# EAGLE board Tommy (EAGLE 6.3), part 1 of 3
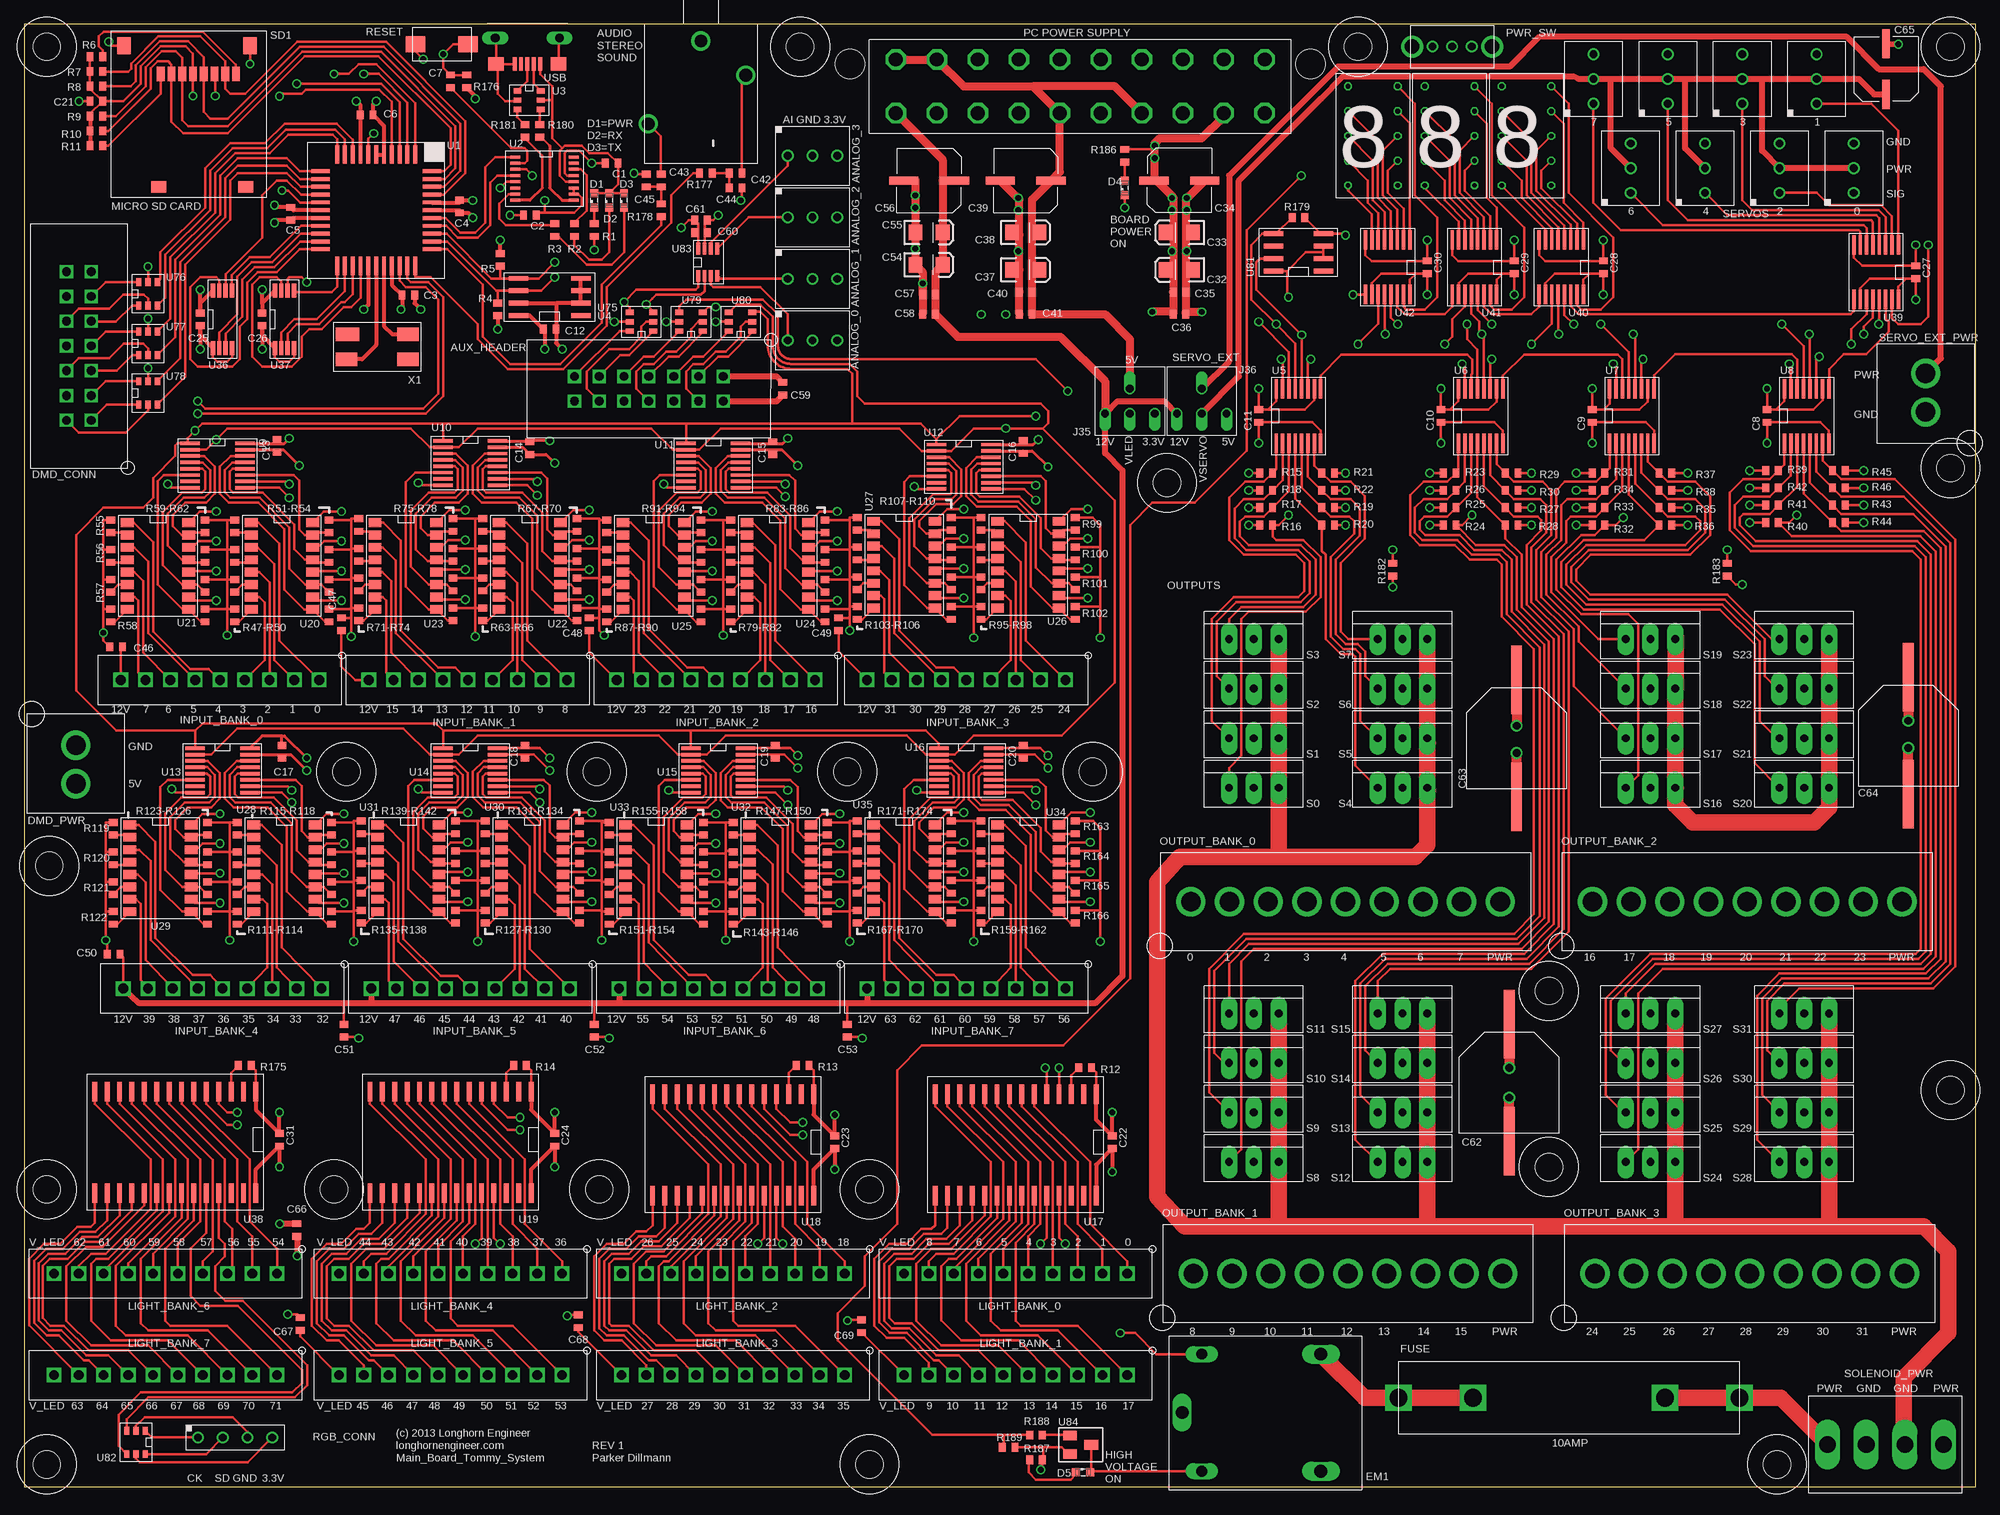
[diagram p0: board, top side]
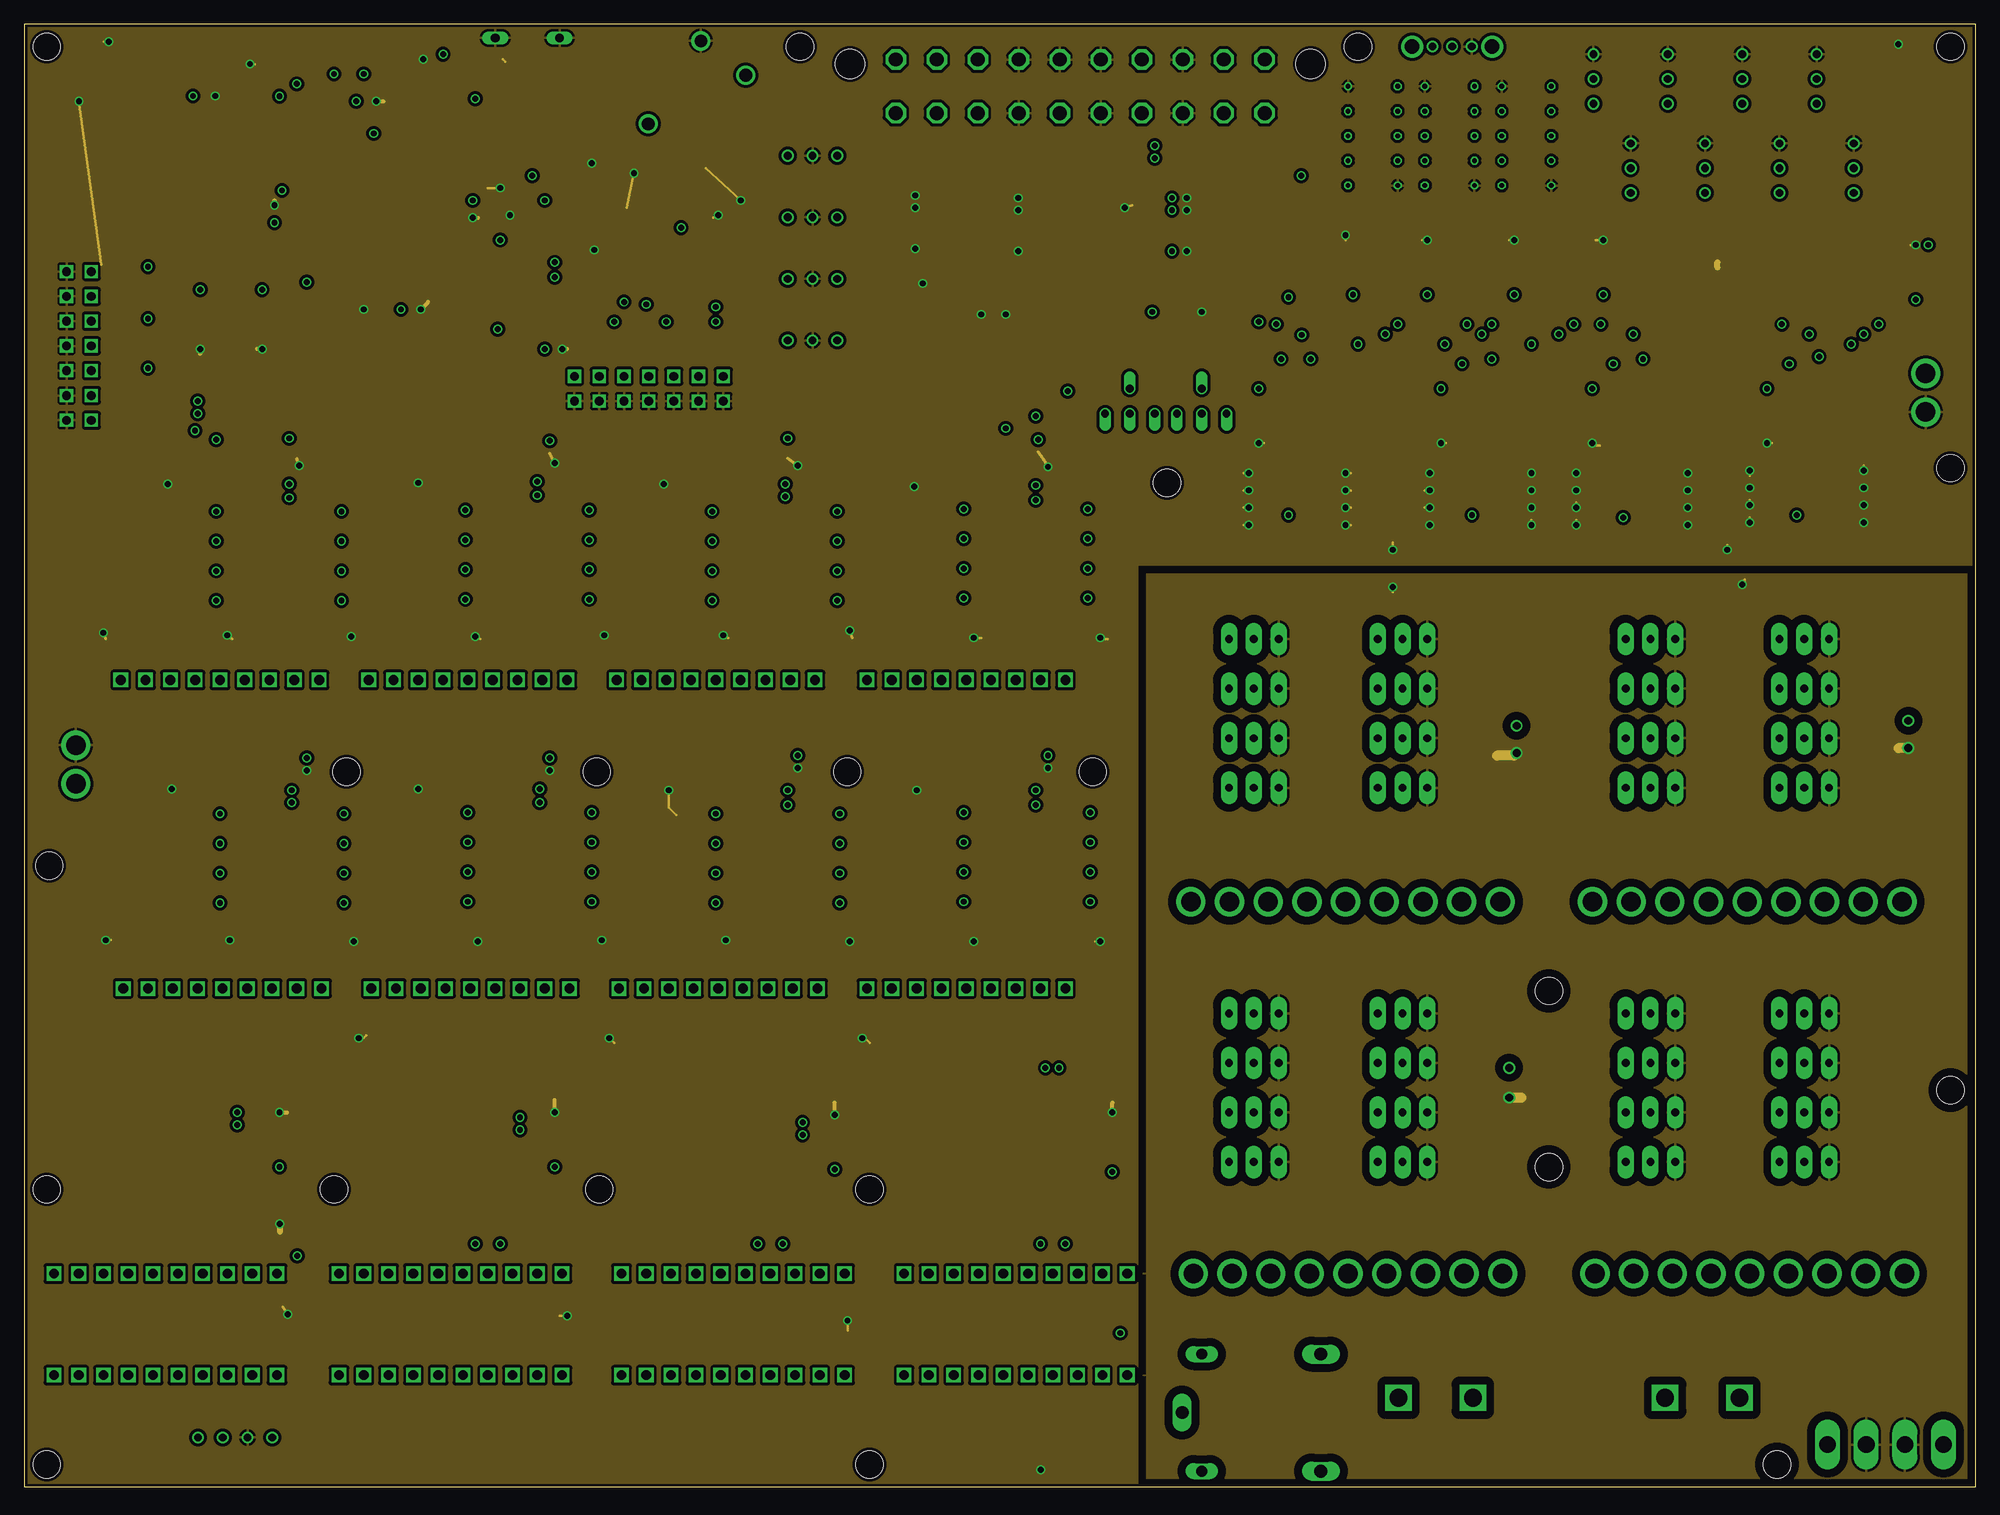
[diagram p1: board, inner layer GND]
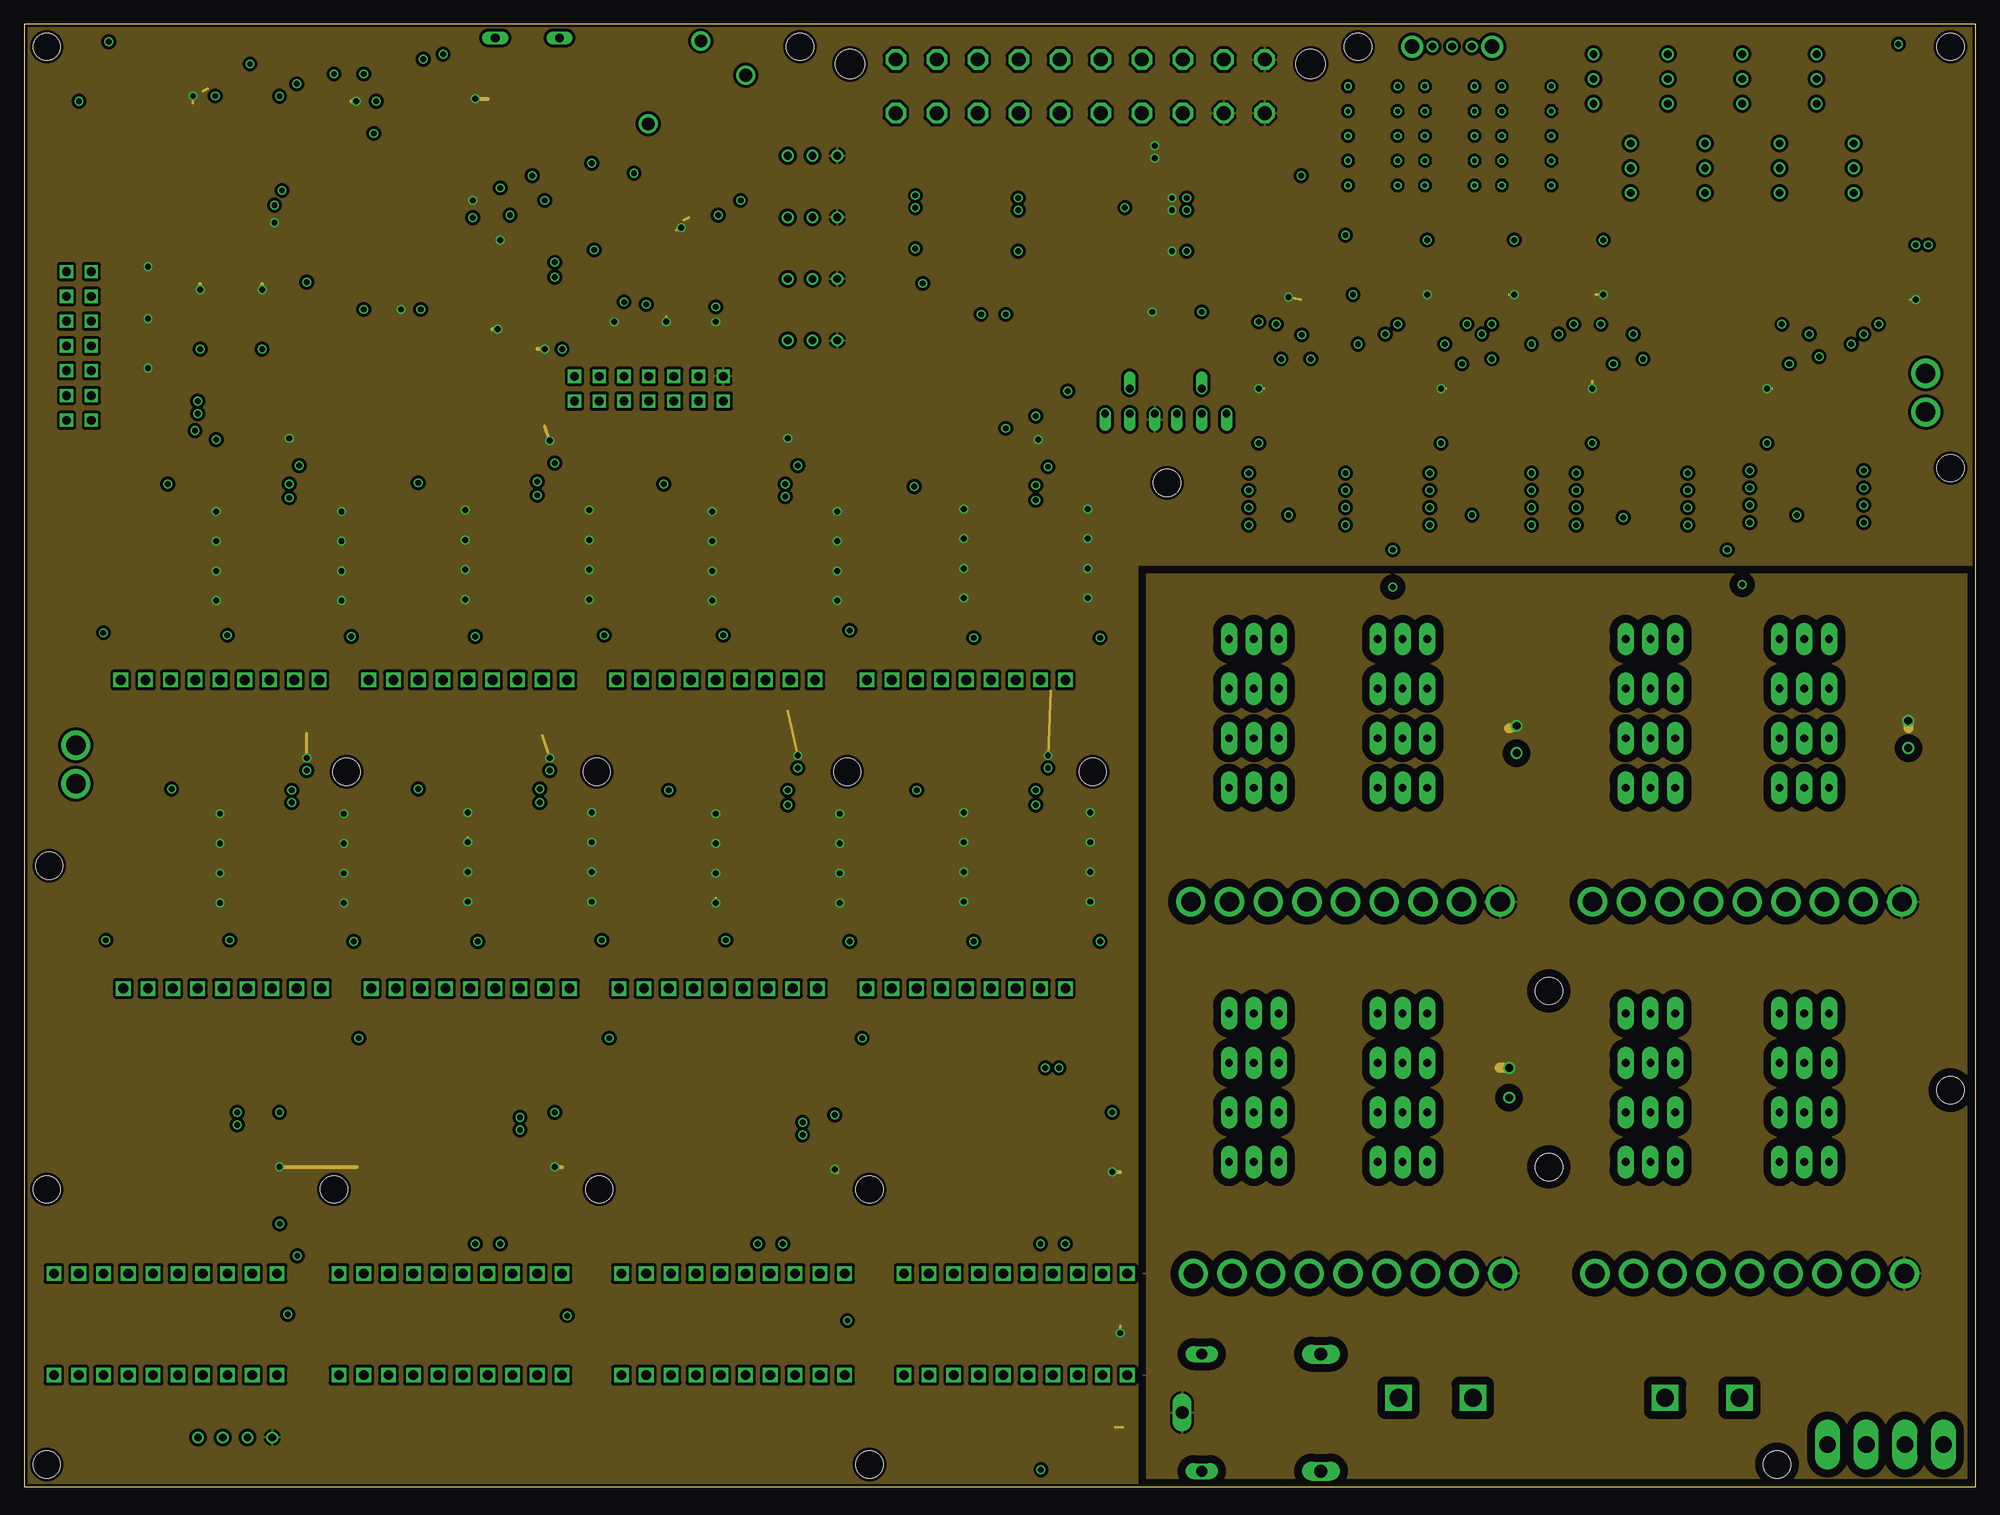
[diagram p2: board, inner layer POWER]
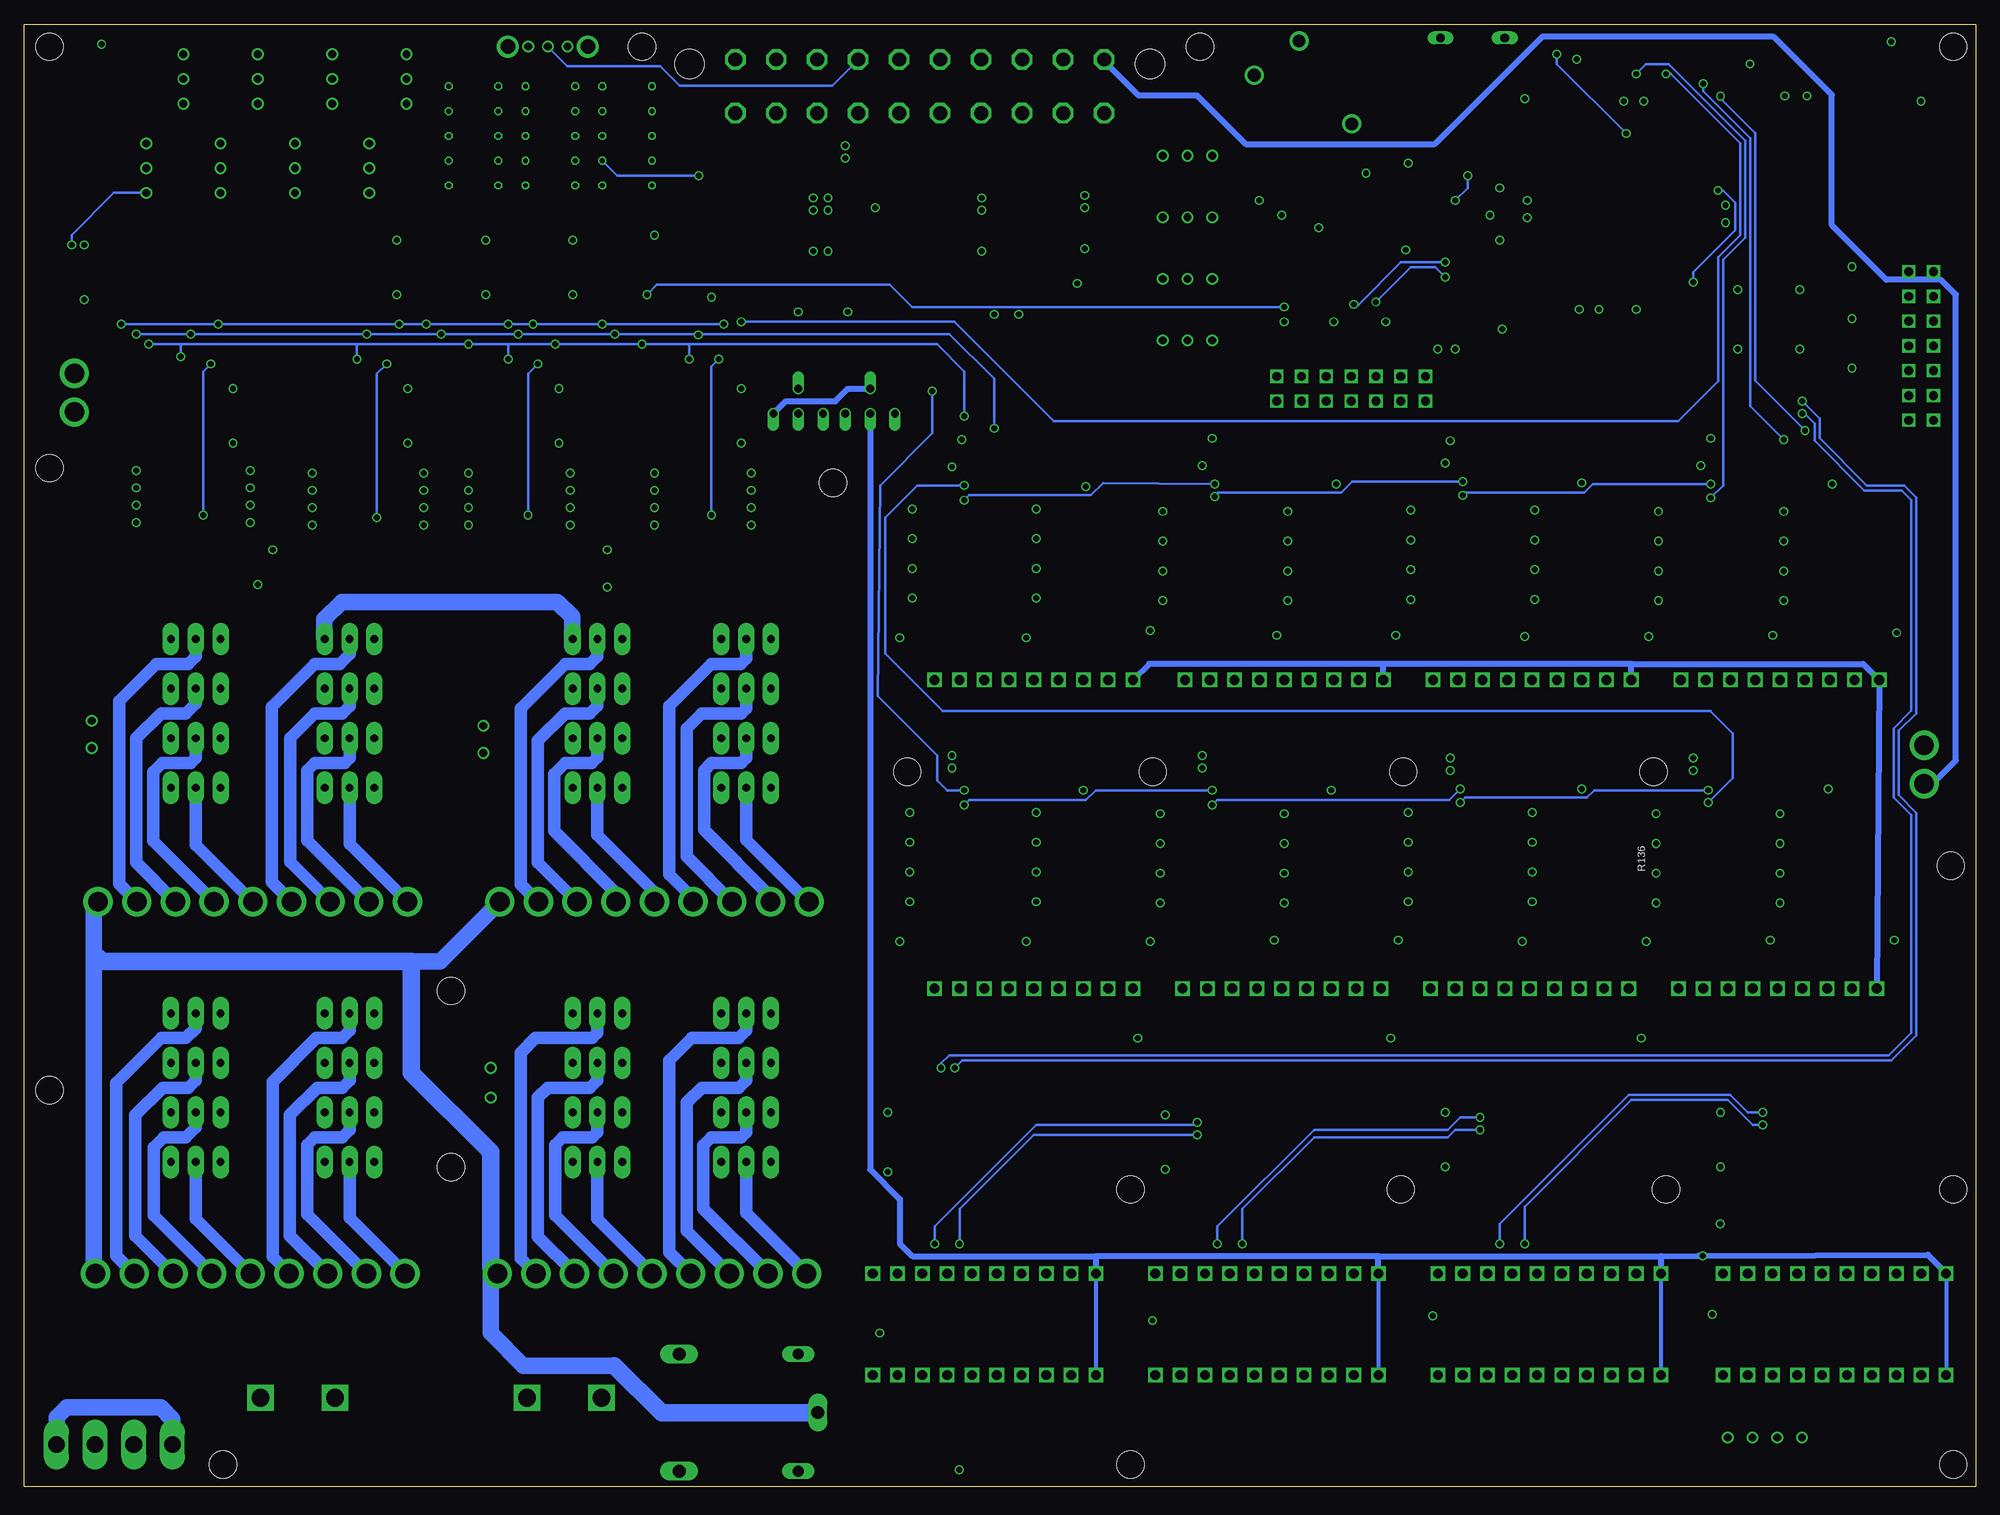
[diagram p3: board, bottom side, seen from below]

Size 199.9 x 149.86 mm. Coordinates in mm from the lower left corner, seen from the top.
Outline: 0,0 199.9,0 199.9,149.86 0,149.86 0,0
Copper layers (1*2*15*16): Top 0.035mm / dielectric 0.2mm / GND 0.0175mm / dielectric 1.1mm / POWER 0.0175mm / dielectric 0.2mm / Bottom 0.035mm
Design rules "SeeedStudio_4_Layer_DRU": minimum track width 6mil, minimum drill 12mil, track to track 6mil, track to pad 6mil, pad to pad 6mil, via to via 6mil, smd to smd 0mil, copper to edge 10mil, drill to drill 10mil, minimum pad ring 6mil, minimum via ring 6mil, stop-mask expansion 2mil, vias tented up to drill 25mil, thermal gap 10mil

## Footprints (pad centres in the part's own frame; a part is rotated, then mirrored left to right if it is on the bottom)
HEADER_01X03_PTH = drill 0.8: 1 0,0; 2 2.54,0; 3 5.08,0
161-3507-E = drill 1.3: 1 1.7,0; 2 10.2,-5.4; 5 5.2,4.6
HEADER_02X07_PTH = drill 0.9 square: 1 -7.62,-1.27; 2 -5.08,-1.27; 3 -2.54,-1.27; 4 0,-1.27; 5 2.54,-1.27; 6 5.08,-1.27; 7 7.62,-1.27; 8 7.62,1.27; 9 5.08,1.27; 10 2.54,1.27; 11 0,1.27; 12 -2.54,1.27; 13 -5.08,1.27; 14 -7.62,1.27
0402 = smd 0.7 x 0.9: 1 -0.65,0; 2 0.65,0
1206_POLARIZED = smd 1.4 x 1.6: + 1.4,0; - -1.4,0
6.3MM_CAP_SMD = smd 0.8 x 3: NEG 0,-2.6; POS 0,2.6
EEH-ZA1V271P = smd 7 x 1.1: N -6,0; P 6,0
SML0603 = smd 0.8 x 0.8: A 0.75,0; C -0.75,0
MOLEX_KK_2 = drill 2: P$1 -1.88,0; P$2 2.083,0
G5LA_PCBRELAY_SPDT = drill 1.3 long: 1 0,0; 3 14.2,6; 4 14.2,-6 | drill 1.1 long: 2 2,6; 5 2,-6
4245K = drill 1.8 square: 1A -17.465,0; 1B -9.845,0; 2A 17.465,0; 2B 9.845,0
HEADER_01X09_PTH = drill 1 square: 1 -10.16,0; 2 -7.62,0; 3 -5.08,0; 4 -2.54,0; 5 0,0; 6 2.54,0; 7 5.08,0; 8 7.62,0; 9 10.16,0
ROYS_VOLTAGE_CHOOSER = drill 0.8 offset: 1 0,2.54; 2 -2.54,0; 3 0,-2.54; OUT 0,0
HEADER_01X10_PTH = drill 1 square: 1 -11.43,0; 2 -8.89,0; 3 -6.35,0; 4 -3.81,0; 5 -1.27,0; 6 1.27,0; 7 3.81,0; 8 6.35,0; 9 8.89,0; 10 11.43,0
MOLEX_KK_9 = drill 2: P$1 -15.85,0; P$2 -11.887,0; P$3 -7.925,0; P$4 -3.962,0; P$5 0,0; P$6 3.962,0; P$7 7.925,0; P$8 11.887,0; P$9 15.85,0
MOLEX_39-29-9202 = drill 1.4 octagon: 1 18.9,-2.75; 2 18.9,2.75; 3 14.7,-2.75; 4 14.7,2.75; 5 10.5,-2.75; 6 10.5,2.75; 7 6.3,-2.75; 8 6.3,2.75; 9 2.1,-2.75; 10 2.1,2.75; 11 -2.1,-2.75; 12 -2.1,2.75; 13 -6.3,-2.75; 14 -6.3,2.75; 15 -10.5,-2.75; 16 -10.5,2.75; 17 -14.7,-2.75; 18 -14.7,2.75; 19 -18.9,-2.75; 20 -18.9,2.75 | hole 3: -23.6,2.29; 23.6,2.29
101-0134-EV = smd 2 x 1.6: 1 -2.7,0; 2 2.7,0
HEADER_01X04_PTH_ROUND = drill 0.8: 1 -3.81,0; 2 -1.27,0; 3 1.27,0; 4 3.81,0
TO-220AB = drill 0.8 pad 1.676 long: D 0,0; G 2.54,0; S -2.54,0
502570-0893 = smd 0.8 x 1.5: 1 7.7,0; 2 6.6,0; 3 5.5,0; 4 4.4,0; 5 3.3,0; 6 2.2,0; 7 1.1,0; 8 0,0 | smd 1.4 x 1.73: SHIELD0 -3.75,2.9; SHIELD1 9.15,2.9 | smd 1.5 x 1.15: SHIELD2 8.7,-11.575; SHIELD3 -0.2,-11.575
LSHD-A103 = drill 0.5 octagon: 1 -2.54,5.08; 2 -2.54,2.54; 3 -2.54,0; 4 -2.54,-2.54; 5 -2.54,-5.08; 6 2.54,-5.08; 7 2.54,-2.54; 8 2.54,0; 9 2.54,2.54; 10 2.54,5.08
MOLEX_KK_4 = drill 1.702 long: 1 -6.248,0; 2 -2.286,0; 3 1.676,0; 4 5.639,0
0S102011MS2QS1 = drill 0.8: 1 -2.007,0; 2 0,0; 3 2.007,0 | drill 1.5: P$4 -4.102,0; P$5 4.102,0
LQFP-44 = smd 1.9 x 0.4: 1 -5.7,4; 2 -5.7,3.2; 3 -5.7,2.4; 4 -5.7,1.6; 5 -5.7,0.8; 6 -5.7,0; 7 -5.7,-0.8; 8 -5.7,-1.6; 9 -5.7,-2.4; 10 -5.7,-3.2; 11 -5.7,-4; 23 5.7,-4; 24 5.7,-3.2; 25 5.7,-2.4; 26 5.7,-1.6; 27 5.7,-0.8; 28 5.7,0; 29 5.7,0.8; 30 5.7,1.6; 31 5.7,2.4; 32 5.7,3.2; 33 5.7,4 | smd 0.4 x 1.9: 12 -4,-5.7; 13 -3.2,-5.7; 14 -2.4,-5.7; 15 -1.6,-5.7; 16 -0.8,-5.7; 17 0,-5.7; 18 0.8,-5.7; 19 1.6,-5.7; 20 2.4,-5.7; 21 3.2,-5.7; 22 4,-5.7; 34 4,5.7; 35 3.2,5.7; 36 2.4,5.7; 37 1.6,5.7; 38 0.8,5.7; 39 0,5.7; 40 -0.8,5.7; 41 -1.6,5.7; 42 -2.4,5.7; 43 -3.2,5.7; 44 -4,5.7
SSOP-16 = smd 0.305 x 1.016: 1 -1.905,-3.175; 2 -1.27,-3.175; 3 -0.635,-3.175; 4 0,-3.175; 5 0.635,-3.175; 6 1.27,-3.175; 7 1.905,-3.175; 8 2.54,-3.175; 9 2.54,2.819; 10 1.905,2.819; 11 1.27,2.819; 12 0.635,2.819; 13 0,2.819; 14 -0.635,2.819; 15 -1.27,2.819; 16 -1.905,2.819
SOT-457 = smd 0.8 x 0.55: 1 -1.2,0.95; 2 -1.2,0; 3 -1.2,-0.95; 4 1.2,-0.95; 5 1.2,0; 6 1.2,0.95
SOIC-8_W = smd 0.5 x 2: 1 -1.905,-3.185; 2 -0.635,-3.185; 3 0.635,-3.185; 4 1.905,-3.185; 5 1.905,3.185; 6 0.635,3.185; 7 -0.635,3.185; 8 -1.905,3.185
TTSOP-16 = smd 0.35 x 2: 1 -2.275,-2.8; 2 -1.625,-2.8; 3 -0.975,-2.8; 4 -0.325,-2.8; 5 0.325,-2.8; 6 0.975,-2.8; 7 1.625,-2.8; 8 2.275,-2.8; 9 2.275,2.8; 10 1.625,2.8; 11 0.975,2.8; 12 0.325,2.8; 13 -0.325,2.8; 14 -0.975,2.8; 15 -1.625,2.8; 16 -2.275,2.8
SOP-28 = smd 0.5 x 2: 1 -8.255,-5.2; 2 -6.985,-5.2; 3 -5.715,-5.2; 4 -4.445,-5.2; 5 -3.175,-5.2; 6 -1.905,-5.2; 7 -0.635,-5.2; 8 0.635,-5.2; 9 1.905,-5.2; 10 3.175,-5.2; 11 4.445,-5.2; 12 5.715,-5.2; 13 6.985,-5.2; 14 8.255,-5.2; 15 8.255,5.2; 16 6.985,5.2; 17 5.715,5.2; 18 4.445,5.2; 19 3.175,5.2; 20 1.905,5.2; 21 0.635,5.2; 22 -0.635,5.2; 23 -1.905,5.2; 24 -3.175,5.2; 25 -4.445,5.2; 26 -5.715,5.2; 27 -6.985,5.2; 28 -8.255,5.2
SOP-16 = smd 0.9 x 1.3: 1 -4.445,-3.15; 2 -3.175,-3.15; 3 -1.905,-3.15; 4 -0.635,-3.15; 5 0.635,-3.15; 6 1.905,-3.15; 7 3.175,-3.15; 8 4.445,-3.15; 9 4.445,3.15; 10 3.175,3.15; 11 1.905,3.15; 12 0.635,3.15; 13 -0.635,3.15; 14 -1.905,3.15; 15 -3.175,3.15; 16 -4.445,3.15
TTSOP-8 = smd 0.45 x 1.45: 1 -0.975,-2.95; 2 -0.325,-2.95; 3 0.325,-2.95; 4 0.975,-2.95; 5 0.975,2.95; 6 0.325,2.95; 7 -0.325,2.95; 8 -0.975,2.95
SOIC-8 = smd 0.5 x 2: 1 -1.905,-2.55; 2 -0.635,-2.55; 3 0.635,-2.55; 4 1.905,-2.55; 5 1.905,2.55; 6 0.635,2.55; 7 -0.635,2.55; 8 -1.905,2.55
SOT-23-8 = smd 0.38 x 1.2: 1 -1.3,-1.4; 2 -0.65,-1.4; 3 0,-1.4; 4 0.65,-1.4; 5 0.65,1.4; 6 0,1.4; 7 -0.65,1.4; 8 -1.3,1.4
SOT-23 = smd 1 x 1.4: 1 -0.95,-1.1; 2 0.95,-1.1; 3 0,1.1
MOUNT_HOLE_2.8MM = hole 2.8: 0,0
10118193-0001LF = smd 0.4 x 1.35: 1 -1.3,2.54; 2 -0.65,2.54; 3 0,2.54; 4 0.65,2.54; 5 1.3,2.54 | drill 0.9 long: S1 -3.3,-0.135; S2 3.3,-0.135 | smd 1.6 x 1.4: S3 -3.2,2.54; S4 3.2,2.54
7MM_X_5MM = smd 2.2 x 1.4: 1 -3.15,-1.27; 2 -3.15,1.27; 3 3.15,1.27 | smd 2.4 x 1.4: 4 3.05,-1.27

## Placement (x,y rotation side)
ANALOG_0  [HEADER_01X03_PTH]  78.2,117.47 0 top
ANALOG_1  [HEADER_01X03_PTH]  78.2,123.78 0 top
ANALOG_2  [HEADER_01X03_PTH]  78.2,130.09 0 top
ANALOG_3  [HEADER_01X03_PTH]  78.2,136.4 0 top
AUDIO  161-3507-E  [161-3507-E]  69.31,149.86 270 top
AUX  103169-5  [HEADER_02X07_PTH]  63.98,112.52 180 top
C1  .1uF  [0402]  60.17,135.64 180 top
C2  .1uF  [0402]  51.78,130.3 180 top
C3  .1uF  [0402]  39.34,122.1 180 top
C4  .1uF  [0402]  44.57,131.19 90 top
C5  .1uF  [0402]  27.3,130.45 270 top
C6  .1uF  [0402]  35.07,140.59 180 top
C7  .1uF  [0402]  43.66,144.02 90 top
C8  .1uF  [0402]  178.53,109.73 90 top
C9  .1uF  [0402]  160.62,109.73 90 top
C10  .1uF  [0402]  145.13,109.73 90 top
C11  .1uF  [0402]  126.46,109.73 90 top
C12  .1uF  [0402]  53.82,118.62 180 top
C13  .1uF  [0402]  25.88,106.68 90 top
C14  .1uF  [0402]  51.78,106.43 90 top
C15  .1uF  [0402]  76.68,106.43 90 top
C16  .1uF  [0402]  102.33,106.55 90 top
C17  .1uF  [0402]  26.38,75.31 90 top
C18  .1uF  [0402]  51.28,75.31 90 top
C19  .1uF  [0402]  76.93,75.31 90 top
C20  .1uF  [0402]  102.33,75.31 90 top
C21  .1uF  [0402]  7.37,141.99 180 top
C22  .1uF  [0402]  111.46,35.31 270 top
C23  .1uF  [0402]  83.02,35.31 270 top
C24  .1uF  [0402]  54.32,35.56 270 top
C25  .1uF  [0402]  18,119.63 90 top
C26  .1uF  [0402]  24.35,119.63 90 top
C27  .1uF  [0402]  193.77,124.46 270 top
C28  .1uF  [0402]  161.77,124.97 270 top
C29  .1uF  [0402]  152.62,124.97 270 top
C30  .1uF  [0402]  143.73,124.97 270 top
C31  .1uF  [0402]  26.13,35.56 270 top
C32  2.2uF  [1206_POLARIZED]  118.33,124.71 180 top
C33  10uF  [1206_POLARIZED]  118.33,128.52 180 top
C34  100uF  [6.3MM_CAP_SMD]  118.33,133.86 90 top
C35  1uF  [0402]  118.33,122.43 0 top
C36  .1uF  [0402]  118.33,120.14 0 top
C37  2.2uF  [1206_POLARIZED]  102.58,124.71 0 top
C38  10uF  [1206_POLARIZED]  102.58,128.52 0 top
C39  100uF  [6.3MM_CAP_SMD]  102.58,133.86 270 top
C40  1uF  [0402]  102.58,122.43 180 top
C41  .1uF  [0402]  102.58,120.14 180 top
C42  1uF  [0402]  72.87,134.62 180 top
C43  1uF  [0402]  65.25,133.86 270 top
C44  .1uF  [0402]  72.87,133.1 0 top
C45  .1uF  [0402]  63.72,133.86 270 top
C46  .1uF  [0402]  9.4,86.07 0 top
C47  .1uF  [0402]  32.48,88.39 270 top
C48  .1uF  [0402]  57.88,88.39 270 top
C49  .1uF  [0402]  83.41,88.39 270 top
C50  .1uF  [0402]  9.14,54.58 0 top
C51  .1uF  [0402]  32.73,46.74 90 top
C52  .1uF  [0402]  58.39,46.74 90 top
C53  .1uF  [0402]  84.3,46.74 90 top
C54  2.2uF  [1206_POLARIZED]  92.68,125.22 0 top
C55  10uF  [1206_POLARIZED]  92.68,128.52 0 top
C56  100uF  [6.3MM_CAP_SMD]  92.68,133.86 270 top
C57  1uF  [0402]  92.68,122.17 180 top
C58  .1uF  [0402]  92.68,120.14 180 top
C59  .1uF  [0402]  77.69,112.52 90 top
C60  1uF  [0402]  69.31,128.52 180 top
C61  .1uF  [0402]  69.31,129.79 180 top
C62  ULR2C390MNL1GS  [EEH-ZA1V271P]  152.11,41.4 90 top
C63  ULR2C390MNL1GS  [EEH-ZA1V271P]  152.88,76.71 90 top
C64  ULR2C390MNL1GS  [EEH-ZA1V271P]  193.01,76.96 90 top
C65  100uF  [6.3MM_CAP_SMD]  190.72,145.29 180 top
C66  1uF  [0402]  27.9,26.31 270 top
C67  1uF  [0402]  28.25,16.69 270 top
C68  1uF  [0402]  56.75,16.95 270 top
C69  1uF  [0402]  85.77,16.44 270 top
D1  [SML0603]  58.39,131.83 90 top
D2  [SML0603]  59.91,131.83 90 top
D3  [SML0603]  61.44,131.83 90 top
D4  [SML0603]  112.74,133.1 90 top
D5  [SML0603]  108.46,1.49 0 top
DMD_CONN  103169-5  [HEADER_02X07_PTH]  5.59,116.91 90 top
DMD_PWR  [MOLEX_KK_2]  5.26,74.11 270 top
EM1  [G5LA_PCBRELAY_SPDT]  118.62,7.59 0 top
FUSE  4245K  [4245K]  158.24,9.11 0 top
INPUT_BANK_0  5-103669-8  [HEADER_01X09_PTH]  20.03,82.68 180 top
INPUT_BANK_1  5-103669-8  [HEADER_01X09_PTH]  45.43,82.68 180 top
INPUT_BANK_2  5-103669-8  [HEADER_01X09_PTH]  70.83,82.68 180 top
INPUT_BANK_3  5-103669-8  [HEADER_01X09_PTH]  96.49,82.68 180 top
INPUT_BANK_4  5-103669-8  [HEADER_01X09_PTH]  20.29,51.05 180 top
INPUT_BANK_5  5-103669-8  [HEADER_01X09_PTH]  45.69,51.05 180 top
INPUT_BANK_6  5-103669-8  [HEADER_01X09_PTH]  71.09,51.05 180 top
INPUT_BANK_7  5-103669-8  [HEADER_01X09_PTH]  96.49,51.05 180 top
J35  ROYS_VOLTAGE_CHOOSER  [ROYS_VOLTAGE_CHOOSER]  113.25,109.98 270 top
J36  ROYS_VOLTAGE_CHOOSER  [ROYS_VOLTAGE_CHOOSER]  120.62,109.98 270 top
LIGHT_BANK_0  103414-8  [HEADER_01X10_PTH]  101.55,21.84 180 top
LIGHT_BANK_1  103414-8  [HEADER_01X10_PTH]  101.55,11.43 180 top
LIGHT_BANK_2  103414-8  [HEADER_01X10_PTH]  72.6,21.84 180 top
LIGHT_BANK_3  103414-8  [HEADER_01X10_PTH]  72.6,11.43 180 top
LIGHT_BANK_4  103414-8  [HEADER_01X10_PTH]  43.66,21.84 180 top
LIGHT_BANK_5  103414-8  [HEADER_01X10_PTH]  43.66,11.43 180 top
LIGHT_BANK_6  103414-8  [HEADER_01X10_PTH]  14.45,21.84 180 top
LIGHT_BANK_7  103414-8  [HEADER_01X10_PTH]  14.45,11.43 180 top
OUTPUT_BANK_0  26-61-4090  [MOLEX_KK_9]  135.35,59.94 0 top
OUTPUT_BANK_1  26-61-4090  [MOLEX_KK_9]  135.6,21.84 0 top
OUTPUT_BANK_2  26-61-4090  [MOLEX_KK_9]  176.5,59.94 0 top
OUTPUT_BANK_3  26-61-4090  [MOLEX_KK_9]  176.75,21.84 0 top
PC_POWER_SUPPLY  MOLEX_39-29-9202  [MOLEX_39-29-9202]  108.17,143.51 0 top
R1  330  [0402]  58.39,128.78 90 top
R2  330  [0402]  56.36,128.78 270 top
R3  330  [0402]  54.32,128.78 270 top
R4  10K  [0402]  48.48,120.65 270 top
R5  10K  [0402]  48.74,125.73 90 top
R6  10K  [0402]  7.37,146.56 180 top
R7  10K  [0402]  7.37,145.03 180 top
R8  10K  [0402]  7.37,143.51 180 top
R9  10K  [0402]  7.37,140.46 180 top
R10  10K  [0402]  7.37,138.94 180 top
R11  10K  [0402]  7.37,137.41 180 top
R12  1.25K  [0402]  108.68,42.94 0 top
R13  1.25K  [0402]  79.72,43.19 0 top
R14  1.25K  [0402]  50.77,43.18 0 top
R15  10K  [0402]  127.22,103.89 0 top
R16  10K  [0402]  127.22,98.55 0 top
R17  10K  [0402]  127.22,100.33 0 top
R18  10K  [0402]  127.22,102.11 0 top
R19  10K  [0402]  133.57,100.33 180 top
R20  10K  [0402]  133.57,98.55 180 top
R21  10K  [0402]  133.57,103.89 180 top
R22  10K  [0402]  133.57,102.11 180 top
R23  10K  [0402]  146.02,103.89 0 top
R24  10K  [0402]  146.02,98.55 0 top
R25  10K  [0402]  146.02,100.33 0 top
R26  10K  [0402]  146.02,102.11 0 top
R27  10K  [0402]  152.37,100.33 180 top
R28  10K  [0402]  152.37,98.55 180 top
R29  10K  [0402]  152.37,103.89 180 top
R30  10K  [0402]  152.37,102.11 180 top
R31  10K  [0402]  161.26,103.89 0 top
R32  10K  [0402]  161.26,98.55 0 top
R33  10K  [0402]  161.26,100.33 0 top
R34  10K  [0402]  161.26,102.11 0 top
R35  10K  [0402]  168.12,100.33 180 top
R36  10K  [0402]  168.12,98.55 180 top
R37  10K  [0402]  168.12,103.89 180 top
R38  10K  [0402]  168.12,102.11 180 top
R39  10K  [0402]  179.04,104.14 0 top
R40  10K  [0402]  179.04,98.81 0 top
R41  10K  [0402]  179.04,100.58 0 top
R42  10K  [0402]  179.04,102.36 0 top
R43  10K  [0402]  185.9,100.58 180 top
R44  10K  [0402]  185.9,98.81 180 top
R45  10K  [0402]  185.9,104.14 180 top
R46  10K  [0402]  185.9,102.36 180 top
R47  180  [0402]  21.56,98.42 90 top
R48  180  [0402]  21.56,95.38 90 top
R49  180  [0402]  21.56,92.33 90 top
R50  180  [0402]  21.56,89.28 90 top
R51  100  [0402]  31.21,98.42 270 top
R52  100  [0402]  31.21,95.38 270 top
R53  100  [0402]  31.21,92.33 270 top
R54  100  [0402]  31.21,89.28 270 top
R55  180  [0402]  8.86,98.42 90 top
R56  180  [0402]  8.86,95.38 90 top
R57  180  [0402]  8.86,92.33 90 top
R58  180  [0402]  8.86,89.28 90 top
R59  100  [0402]  18.51,98.42 270 top
R60  100  [0402]  18.51,95.38 270 top
R61  100  [0402]  18.51,92.33 270 top
R62  100  [0402]  18.51,89.28 270 top
R63  180  [0402]  46.96,98.55 90 top
R64  180  [0402]  46.96,95.5 90 top
R65  180  [0402]  46.96,92.46 90 top
R66  180  [0402]  46.96,89.41 90 top
R67  100  [0402]  56.61,98.55 270 top
R68  100  [0402]  56.61,95.5 270 top
R69  100  [0402]  56.61,92.46 270 top
R70  100  [0402]  56.61,89.41 270 top
R71  180  [0402]  34.26,98.55 90 top
R72  180  [0402]  34.26,95.5 90 top
R73  180  [0402]  34.26,92.46 90 top
R74  180  [0402]  34.26,89.41 90 top
R75  100  [0402]  43.91,98.55 270 top
R76  100  [0402]  43.91,95.5 270 top
R77  100  [0402]  43.91,92.46 270 top
R78  100  [0402]  43.91,89.41 270 top
R79  180  [0402]  72.36,98.42 90 top
R80  180  [0402]  72.36,95.38 90 top
R81  180  [0402]  72.36,92.33 90 top
R82  180  [0402]  72.36,89.28 90 top
R83  100  [0402]  82.01,98.42 270 top
R84  100  [0402]  82.01,95.38 270 top
R85  100  [0402]  82.01,92.33 270 top
R86  100  [0402]  82.01,89.28 270 top
R87  180  [0402]  59.66,98.42 90 top
R88  180  [0402]  59.66,95.38 90 top
R89  180  [0402]  59.66,92.33 90 top
R90  180  [0402]  59.66,89.28 90 top
R91  100  [0402]  69.31,98.42 270 top
R92  100  [0402]  69.31,95.38 270 top
R93  100  [0402]  69.31,92.33 270 top
R94  100  [0402]  69.31,89.28 270 top
R95  180  [0402]  98.01,98.68 90 top
R96  180  [0402]  98.01,95.63 90 top
R97  180  [0402]  98.01,92.58 90 top
R98  180  [0402]  98.01,89.53 90 top
R99  100  [0402]  107.66,98.68 270 top
R100  100  [0402]  107.66,95.63 270 top
R101  100  [0402]  107.66,92.58 270 top
R102  100  [0402]  107.66,89.53 270 top
R103  180  [0402]  85.31,98.68 90 top
R104  180  [0402]  85.31,95.63 90 top
R105  180  [0402]  85.31,92.58 90 top
R106  180  [0402]  85.31,89.53 90 top
R107  100  [0402]  94.96,98.68 270 top
R108  100  [0402]  94.96,95.63 270 top
R109  100  [0402]  94.96,92.58 270 top
R110  100  [0402]  94.96,89.53 270 top
R111  180  [0402]  21.81,67.44 90 top
R112  180  [0402]  21.81,64.39 90 top
R113  180  [0402]  21.81,61.34 90 top
R114  180  [0402]  21.81,58.29 90 top
R115  100  [0402]  31.46,67.44 270 top
R116  100  [0402]  31.46,64.39 270 top
R117  100  [0402]  31.46,61.34 270 top
R118  100  [0402]  31.46,58.29 270 top
R119  180  [0402]  9.11,67.44 90 top
R120  180  [0402]  9.11,64.39 90 top
R121  180  [0402]  9.11,61.34 90 top
R122  180  [0402]  9.11,58.29 90 top
R123  100  [0402]  18.76,67.44 270 top
R124  100  [0402]  18.76,64.39 270 top
R125  100  [0402]  18.76,61.34 270 top
R126  100  [0402]  18.76,58.29 270 top
R127  180  [0402]  47.21,67.56 90 top
R128  180  [0402]  47.21,64.52 90 top
R129  180  [0402]  47.21,61.47 90 top
R130  180  [0402]  47.21,58.42 90 top
R131  100  [0402]  56.86,67.56 270 top
R132  100  [0402]  56.86,64.52 270 top
R133  100  [0402]  56.86,61.47 270 top
R134  100  [0402]  56.86,58.42 270 top
R135  180  [0402]  34.51,67.56 90 top
R136  180  [0402]  34.51,64.52 90 top
R137  180  [0402]  34.51,61.47 90 top
R138  180  [0402]  34.51,58.42 90 top
R139  100  [0402]  44.16,67.56 270 top
R140  100  [0402]  44.16,64.52 270 top
R141  100  [0402]  44.16,61.47 270 top
R142  100  [0402]  44.16,58.42 270 top
R143  180  [0402]  72.61,67.44 90 top
R144  180  [0402]  72.61,64.39 90 top
R145  180  [0402]  72.61,61.34 90 top
R146  180  [0402]  72.61,58.29 90 top
R147  100  [0402]  82.26,67.44 270 top
R148  100  [0402]  82.26,64.39 270 top
R149  100  [0402]  82.26,61.34 270 top
R150  100  [0402]  82.26,58.29 270 top
R151  180  [0402]  59.91,67.44 90 top
R152  180  [0402]  59.91,64.39 90 top
R153  180  [0402]  59.91,61.34 90 top
R154  180  [0402]  59.91,58.29 90 top
R155  100  [0402]  69.56,67.44 270 top
R156  100  [0402]  69.56,64.39 270 top
R157  100  [0402]  69.56,61.34 270 top
R158  100  [0402]  69.56,58.29 270 top
R159  180  [0402]  98.01,67.56 90 top
R160  180  [0402]  98.01,64.52 90 top
R161  180  [0402]  98.01,61.47 90 top
R162  180  [0402]  98.01,58.42 90 top
R163  100  [0402]  107.66,67.56 270 top
R164  100  [0402]  107.66,64.52 270 top
R165  100  [0402]  107.66,61.47 270 top
R166  100  [0402]  107.66,58.42 270 top
R167  180  [0402]  85.31,67.56 90 top
R168  180  [0402]  85.31,64.52 90 top
R169  180  [0402]  85.31,61.47 90 top
R170  180  [0402]  85.31,58.42 90 top
R171  100  [0402]  94.96,67.56 270 top
R172  100  [0402]  94.96,64.52 270 top
R173  100  [0402]  94.96,61.47 270 top
R174  100  [0402]  94.96,58.42 270 top
R175  1.25K  [0402]  22.57,43.18 0 top
R176  10K  [0402]  45.31,144.02 270 top
R177  1K  [0402]  69.82,134.62 0 top
R178  1K  [0402]  65.25,130.81 90 top
R179  10K  [0402]  130.52,130.05 0 top
R180  22  [0402]  52.8,138.94 90 top
R181  22  [0402]  51.28,138.94 90 top
R182  0  [0402]  140.18,93.98 90 top
R183  0  [0402]  174.47,93.98 90 top
R186  330  [0402]  112.74,136.4 90 top
R187  330  [0402]  103.63,2.76 180 top
R188  1K  [0402]  103.63,5.3 0 top
R189  10K  [0402]  100.84,4.03 0 top
RESET  101-0134-EV  [101-0134-EV]  42.77,147.83 0 top
RGB_CONN  [HEADER_01X04_PTH_ROUND]  21.59,5.05 0 top
S0  RFP12N10L  [TO-220AB]  125.95,71.63 180 top
S1  RFP12N10L  [TO-220AB]  125.95,76.71 180 top
S2  RFP12N10L  [TO-220AB]  125.95,81.79 180 top
S3  RFP12N10L  [TO-220AB]  125.95,86.87 180 top
S4  RFP12N10L  [TO-220AB]  141.19,71.63 180 top
S5  RFP12N10L  [TO-220AB]  141.19,76.71 180 top
S6  RFP12N10L  [TO-220AB]  141.19,81.79 180 top
S7  RFP12N10L  [TO-220AB]  141.19,86.87 180 top
S8  RFP12N10L  [TO-220AB]  125.95,33.27 180 top
S9  RFP12N10L  [TO-220AB]  125.95,38.35 180 top
S10  RFP12N10L  [TO-220AB]  125.95,43.43 180 top
S11  RFP12N10L  [TO-220AB]  125.95,48.51 180 top
S12  RFP12N10L  [TO-220AB]  141.19,33.27 180 top
S13  RFP12N10L  [TO-220AB]  141.19,38.35 180 top
S14  RFP12N10L  [TO-220AB]  141.19,43.43 180 top
S15  RFP12N10L  [TO-220AB]  141.19,48.51 180 top
S16  RFP12N10L  [TO-220AB]  166.59,71.63 180 top
S17  RFP12N10L  [TO-220AB]  166.59,76.71 180 top
S18  RFP12N10L  [TO-220AB]  166.59,81.79 180 top
S19  RFP12N10L  [TO-220AB]  166.59,86.87 180 top
S20  RFP12N10L  [TO-220AB]  182.34,71.63 180 top
S21  RFP12N10L  [TO-220AB]  182.34,76.71 180 top
S22  RFP12N10L  [TO-220AB]  182.34,81.79 180 top
S23  RFP12N10L  [TO-220AB]  182.34,86.87 180 top
S24  RFP12N10L  [TO-220AB]  166.59,33.27 180 top
S25  RFP12N10L  [TO-220AB]  166.59,38.35 180 top
S26  RFP12N10L  [TO-220AB]  166.59,43.43 180 top
S27  RFP12N10L  [TO-220AB]  166.59,48.51 180 top
S28  RFP12N10L  [TO-220AB]  182.34,33.27 180 top
S29  RFP12N10L  [TO-220AB]  182.34,38.35 180 top
S30  RFP12N10L  [TO-220AB]  182.34,43.43 180 top
S31  RFP12N10L  [TO-220AB]  182.34,48.51 180 top
SD1  502570-0893  [502570-0893]  13.97,144.78 0 top
SEG1  LSHD-A103  [LSHD-A103]  153.89,138.43 0 top
SEG2  LSHD-A103  [LSHD-A103]  146.02,138.43 0 top
SEG3  LSHD-A103  [LSHD-A103]  138.14,138.43 0 top
SERVO_0  [HEADER_01X03_PTH]  187.42,132.59 90 top
SERVO_1  [HEADER_01X03_PTH]  183.61,141.73 90 top
SERVO_2  [HEADER_01X03_PTH]  179.8,132.59 90 top
SERVO_3  [HEADER_01X03_PTH]  175.99,141.73 90 top
SERVO_4  [HEADER_01X03_PTH]  172.18,132.59 90 top
SERVO_5  [HEADER_01X03_PTH]  168.37,141.73 90 top
SERVO_6  [HEADER_01X03_PTH]  164.56,132.59 90 top
SERVO_7  [HEADER_01X03_PTH]  160.75,141.73 90 top
SERVO_EXT_PWR  26-61-4020  [MOLEX_KK_2]  194.79,112.01 90 top
SOLENOID_PWR  26-61-4020  [MOLEX_KK_4]  190.98,4.32 0 top
SW2  0S102011MS2QS1  [0S102011MS2QS1]  146.27,147.59 180 top
U1  P8X32A-Q44  [LQFP-44]  36.04,130.81 270 top
U2  FT230X  [SSOP-16]  53.46,134.37 270 top
U3  IP4234CZ6  [SOT-457]  51.71,142.09 0 top
U4  CAT24M01XI-T2  [SOIC-8_W]  53.82,121.92 90 top
U5  74HC595D-Q100  [TTSOP-16]  130.52,109.73 0 top
U6  74HC595D-Q100  [TTSOP-16]  149.19,109.73 0 top
U7  74HC595D-Q100  [TTSOP-16]  164.69,109.73 0 top
U8  74HC595D-Q100  [TTSOP-16]  182.59,109.73 0 top
U9  SN74HC165QPWRG4Q1  [TTSOP-16]  19.78,104.65 270 top
U10  SN74HC165QPWRG4Q1  [TTSOP-16]  45.69,104.9 270 top
U11  SN74HC165QPWRG4Q1  [TTSOP-16]  70.58,104.65 270 top
U12  SN74HC165QPWRG4Q1  [TTSOP-16]  96.23,104.52 270 top
U13  SN74HC165QPWRG4Q1  [TTSOP-16]  20.29,73.41 270 top
U14  SN74HC165QPWRG4Q1  [TTSOP-16]  45.69,73.41 270 top
U15  SN74HC165QPWRG4Q1  [TTSOP-16]  71.09,73.41 270 top
U16  SN74HC165QPWRG4Q1  [TTSOP-16]  96.49,73.41 270 top
U17  WS2803  [SOP-28]  101.55,35.05 180 top
U18  WS2803  [SOP-28]  72.6,35.05 180 top
U19  WS2803  [SOP-28]  43.66,35.31 180 top
U20  TCMT4100  [SOP-16]  26.38,94.36 270 top
U21  TCMT4100  [SOP-16]  13.68,94.36 270 top
U22  TCMT4100  [SOP-16]  51.78,94.36 270 top
U23  TCMT4100  [SOP-16]  39.08,94.36 270 top
U24  TCMT4100  [SOP-16]  77.18,94.36 270 top
U25  TCMT4100  [SOP-16]  64.48,94.36 270 top
U26  TCMT4100  [SOP-16]  102.84,94.49 270 top
U27  TCMT4100  [SOP-16]  90.14,94.49 270 top
U28  TCMT4100  [SOP-16]  26.64,63.37 270 top
U29  TCMT4100  [SOP-16]  13.94,63.37 270 top
U30  TCMT4100  [SOP-16]  52.04,63.37 270 top
U31  TCMT4100  [SOP-16]  39.34,63.37 270 top
U32  TCMT4100  [SOP-16]  77.44,63.37 270 top
U33  TCMT4100  [SOP-16]  64.74,63.37 270 top
U34  TCMT4100  [SOP-16]  102.84,63.37 270 top
U35  TCMT4100  [SOP-16]  90.14,63.37 270 top
U36  23LC1024-I/ST  [TTSOP-8]  20.29,119.63 0 top
U37  23LC1024-I/ST  [TTSOP-8]  26.64,119.63 0 top
U38  WS2803  [SOP-28]  15.46,35.31 180 top
U39  74HC595D-Q100  [TTSOP-16]  189.71,124.46 180 top
U40  74HC595D-Q100  [TTSOP-16]  157.45,124.97 180 top
U41  74HC595D-Q100  [TTSOP-16]  148.56,124.97 180 top
U42  74HC595D-Q100  [TTSOP-16]  139.67,124.97 180 top
U75  IP4234CZ6  [SOT-457]  63.21,119.38 180 top
U76  IP4234CZ6  [SOT-457]  12.67,122.24 90 top
U77  IP4234CZ6  [SOT-457]  12.67,117.16 90 top
U78  IP4234CZ6  [SOT-457]  12.67,112.08 90 top
U79  IP4234CZ6  [SOT-457]  68.29,119.38 180 top
U80  IP4234CZ6  [SOT-457]  73.37,119.38 180 top
U81  MIC1832MY  [SOIC-8]  130.52,126.49 90 top
U82  IP4234CZ6  [SOT-457]  11.43,4.54 270 top
U83  AD7991YRJZ-0500RL7  [SOT-23-8]  70.33,125.48 0 top
U84  MMBT 3904 LT1  [SOT-23]  108.2,4.29 270 top
U$1  LHE_FRAME  [LHE_FRAME]  38.07,0 0 top
U$2  [MOUNT_HOLE_2.8MM]  2.29,147.57 0 top
U$3  [MOUNT_HOLE_2.8MM]  197.33,147.57 0 top
U$4  [MOUNT_HOLE_2.8MM]  79.47,147.57 0 top
U$5  [MOUNT_HOLE_2.8MM]  136.62,147.57 0 top
U$6  [MOUNT_HOLE_2.8MM]  2.29,30.48 0 top
U$7  [MOUNT_HOLE_2.8MM]  31.72,30.48 0 top
U$8  [MOUNT_HOLE_2.8MM]  58.9,30.48 0 top
U$9  [MOUNT_HOLE_2.8MM]  197.33,40.64 0 top
U$10  [MOUNT_HOLE_2.8MM]  86.58,30.48 0 top
U$11  [MOUNT_HOLE_2.8MM]  32.99,73.28 0 top
U$12  [MOUNT_HOLE_2.8MM]  58.64,73.28 0 top
U$13  [MOUNT_HOLE_2.8MM]  84.3,73.28 0 top
U$14  [MOUNT_HOLE_2.8MM]  109.44,73.28 0 top
U$15  [MOUNT_HOLE_2.8MM]  156.18,32.77 0 top
U$16  [MOUNT_HOLE_2.8MM]  156.18,50.8 0 top
U$17  [MOUNT_HOLE_2.8MM]  117.06,102.87 0 top
U$18  [MOUNT_HOLE_2.8MM]  197.33,104.39 0 top
U$19  [MOUNT_HOLE_2.8MM]  2.54,63.63 0 top
U$20  [MOUNT_HOLE_2.8MM]  86.58,2.29 0 top
U$21  [MOUNT_HOLE_2.8MM]  2.29,2.29 0 top
U$22  [MOUNT_HOLE_2.8MM]  179.55,2.29 0 top
USB  10118193-0001LF  [10118193-0001LF]  51.53,148.34 180 top
X1  ABMM-6.000MHZ-B2-T  [7MM_X_5MM]  36.16,116.81 180 top

## Library data of the parts
ANALOG_0 ANALOG_1-ANALOG_3 AUDIO AUX DMD_CONN DMD_PWR INPUT_BANK_0 INPUT_BANK_1-INPUT_BANK_7 J35 J36 LIGHT_BANK_0 LIGHT_BANK_1-LIGHT_BANK_7 OUTPUT_BANK_0 OUTPUT_BANK_1-OUTPUT_BANK_3 PC_POWER_SUPPLY RGB_CONN SD1 SERVO_0 SERVO_1-SERVO_7 SERVO_EXT_PWR SOLENOID_PWR U$2-U$22 USB = PP_Connectors
C1-C69 FUSE R1-R183 R186-R189 U3 U75-U80 U82 = PP_Passives
D1-D5 = led
EM1 RESET SW2 = PP_Electromechanical
S0 S1-S31 U84 = PP_DiscreteSemi
SEG1-SEG3 = PP_LED
U1 U2 U4-U42 U83 = PP_DigitalIC
U81 X1 = PP_FreqCtrl
U$1 = PP_Aesthetics; DNAME: Parker Dillmann; PNAME: Main_Board_Tommy_System; REVNUM: REV 1

## Nets
3.3V: ANALOG_0.3 ANALOG_1.3 ANALOG_2.3 ANALOG_3.3 AUX.1 C3.2 C4.2 C5.2 C6.2 C8.2 C9.2 C10.2 C11.2 C12.2 C13.2 C14.2 C15.2 C16.2 C17.2 C18.2 C19.2 C20.2 C21.1 C22.2 C23.2 C24.2 C25.2 C26.2 C27.2 C28.2 C29.2 C30.2 C31.2 C32.+ C33.+ C34.POS C35.1 C36.1 C59.2 C60.2 C61.2 EM1.2 J35.1 PC_POWER_SUPPLY.1 PC_POWER_SUPPLY.2 PC_POWER_SUPPLY.3 R4.2 R5.2 R6.2 R7.2 R8.2 R9.2 R10.2 R11.2 R176.2 R186.2 RGB_CONN.4 SD1.5 U1.8 U1.18 U1.30 U1.40 U4.8 U5.10 U5.16 U6.10 U6.16 U7.10 U7.16 U8.10 U8.16 U9.16 U10.16 U11.16 U12.16 U13.16 U14.16 U15.16 U16.16 U17.28 U18.28 U19.28 U20.10 U20.12 U20.14 U20.16 U21.10 U21.12 U21.14 U21.16 U22.10 U22.12 U22.14 U22.16 U23.10 U23.12 U23.14 U23.16 U24.10 U24.12 U24.14 U24.16 U25.10 U25.12 U25.14 U25.16 U26.10 U26.12 U26.14 U26.16 U27.10 U27.12 U27.14 U27.16 U28.10 U28.12 U28.14 U28.16 U29.10 U29.12 U29.14 U29.16 U30.10 U30.12 U30.14 U30.16 U31.10 U31.12 U31.14 U31.16 U32.10 U32.12 U32.14 U32.16 U33.10 U33.12 U33.14 U33.16 U34.10 U34.12 U34.14 U34.16 U35.10 U35.12 U35.14 U35.16 U36.8 U37.8 U38.28 U39.10 U39.16 U40.10 U40.16 U41.10 U41.16 U42.10 U42.16 U75.5 U76.5 U77.5 U78.5 U79.5 U80.5 U81.2 U81.3 U81.8 U82.5 U83.8
3V3OUT: C2.1 U2.3 U2.10 U2.11
5V: C37.+ C38.+ C39.POS C40.1 C41.1 DMD_PWR.P$2 J35.2 J36.1 PC_POWER_SUPPLY.7 PC_POWER_SUPPLY.11 PC_POWER_SUPPLY.18 PC_POWER_SUPPLY.20
12V: C46.2 C47.2 C48.2 C49.2 C50.2 C51.2 C52.2 C53.2 C54.+ C55.+ C56.POS C57.1 C58.1 INPUT_BANK_0.9 INPUT_BANK_1.9 INPUT_BANK_2.9 INPUT_BANK_3.9 INPUT_BANK_4.9 INPUT_BANK_5.9 INPUT_BANK_6.9 INPUT_BANK_7.9 J35.3 J36.3 PC_POWER_SUPPLY.19
-5V: PC_POWER_SUPPLY.16
-12V: PC_POWER_SUPPLY.4
A_0: ANALOG_0.1 U83.3
A_1: ANALOG_1.1 U83.4
A_2: ANALOG_2.1 U83.5
A_3: ANALOG_3.1 U83.6
AUD_L_FILTER: C42.2 C44.1 R177.2
AUD_R_FILTER: C43.2 C45.2 R178.2
AUDIO_L: R177.1 U1.33
AUDIO_OUT_L: AUDIO.5 C42.1
AUDIO_OUT_R: AUDIO.2 C43.1
AUDIO_R: R178.1 U1.34
C0: R47.1 U20.2
C1: R48.1 U20.4
C2: R49.1 U20.6
C3: R50.1 U20.8
C4: R55.1 U21.2
C5: R56.1 U21.4
C6: R57.1 U21.6
C7: R58.1 U21.8
C8: R63.1 U22.2
C9: R64.1 U22.4
C10: R65.1 U22.6
C11: R66.1 U22.8
C12: R71.1 U23.2
C13: R72.1 U23.4
C14: R73.1 U23.6
C15: R74.1 U23.8
C16: R79.1 U24.2
C17: R80.1 U24.4
C18: R81.1 U24.6
C19: R82.1 U24.8
C20: R87.1 U25.2
C21: R88.1 U25.4
C22: R89.1 U25.6
C23: R90.1 U25.8
C24: R95.1 U26.2
C25: R96.1 U26.4
C26: R97.1 U26.6
C27: R98.1 U26.8
C28: R103.1 U27.2
C29: R104.1 U27.4
C30: R105.1 U27.6
C31: R106.1 U27.8
C32: R111.1 U28.2
C33: R112.1 U28.4
C34: R113.1 U28.6
C35: R114.1 U28.8
C36: R119.1 U29.2
C37: R120.1 U29.4
C38: R121.1 U29.6
C39: R122.1 U29.8
C40: R127.1 U30.2
C41: R128.1 U30.4
C42: R129.1 U30.6
C43: R130.1 U30.8
C44: R135.1 U31.2
C45: R136.1 U31.4
C46: R137.1 U31.6
C47: R138.1 U31.8
C48: R143.1 U32.2
C49: R144.1 U32.4
C50: R145.1 U32.6
C51: R146.1 U32.8
C52: R151.1 U33.2
C53: R152.1 U33.4
C54: R153.1 U33.6
C55: R154.1 U33.8
C56: R159.1 U34.2
C57: R160.1 U34.4
C58: R161.1 U34.6
C59: R162.1 U34.8
C60: R167.1 U35.2
C61: R168.1 U35.4
C62: R169.1 U35.6
C63: R170.1 U35.8
D1: D1.C R1.2
D2: D2.C R2.2
D3: D3.C R3.2
D+: U3.1 USB.3
D-: U3.6 USB.2
DATA_CLK: U1.3 U5.12 U6.12 U7.12 U8.12 U9.2 U10.2 U11.2 U12.2 U13.2 U14.2 U15.2 U16.2 U39.12 U40.12 U41.12 U42.12 U80.4 U81.7
DATA_CLK_OUT: AUX.3 U80.6
DATA_IN: U1.2 U9.9
DATA_IN1: U9.10 U10.9
DATA_IN2: U10.10 U11.9
DATA_IN3: U11.10 U12.9
DATA_IN4: U12.10 U13.9
DATA_IN5: U13.10 U14.9
DATA_IN6: U14.10 U15.9
DATA_IN7: U15.10 U16.9
DATA_IN8: U16.10 U79.4
DATA_IN8_OUT: AUX.5 U79.6
DATA_LAT: U1.4 U5.11 U6.11 U7.11 U8.11 U9.1 U10.1 U11.1 U12.1 U13.1 U14.1 U15.1 U16.1 U39.11 U40.11 U41.11 U42.11 U80.3
DATA_LAT_OUT: AUX.2 U80.1
DATA_OUT: U1.1 U5.14
DATA_OUT1: U5.9 U6.14
DATA_OUT2: U6.9 U7.14
DATA_OUT3: U7.9 U8.14
DATA_OUT4: U8.9 U39.14
DATA_OUT5: U39.9 U40.14
DATA_OUT6: U40.9 U41.14
DATA_OUT7: U41.9 U42.14
DATA_OUT8: U42.9 U79.3
DATA_OUT8_OUT: AUX.4 U79.1
DM: R180.2 U3.4
DMD0: U1.14 U78.3
DMD1: U1.13 U78.4
DMD2: U1.12 U77.3
DMD3: U1.11 U77.4
DMD4: U1.10 U76.3
DMD5: U1.9 U76.4
DMD_OUT0: DMD_CONN.1 U78.1
DMD_OUT1: DMD_CONN.2 U78.6
DMD_OUT2: DMD_CONN.3 U77.1
DMD_OUT3: DMD_CONN.4 U77.6
DMD_OUT4: DMD_CONN.5 U76.1
DMD_OUT5: DMD_CONN.6 U76.6
DP: R181.2 U3.3
GND: ANALOG_0.2 ANALOG_1.2 ANALOG_2.2 ANALOG_3.2 AUDIO.1 AUX.8 AUX.9 AUX.10 AUX.11 AUX.12 AUX.13 AUX.14 C1.2 C2.2 C3.1 C4.1 C5.1 C6.1 C8.1 C9.1 C10.1 C11.1 C12.1 C13.1 C14.1 C15.1 C16.1 C17.1 C18.1 C19.1 C20.1 C21.2 C22.1 C23.1 C24.1 C25.1 C26.1 C27.1 C28.1 C29.1 C30.1 C31.1 C32.- C33.- C34.NEG C35.2 C36.2 C37.- C38.- C39.NEG C40.2 C41.2 C44.2 C45.1 C46.1 C47.1 C48.1 C49.1 C50.1 C51.1 C52.1 C53.1 C54.- C55.- C56.NEG C57.2 C58.2 C59.1 C60.1 C61.1 C65.NEG C66.1 C67.1 C68.1 C69.1 D4.C DMD_CONN.8 DMD_CONN.9 DMD_CONN.10 DMD_CONN.11 DMD_CONN.12 DMD_CONN.13 DMD_CONN.14 DMD_PWR.P$1 PC_POWER_SUPPLY.5 PC_POWER_SUPPLY.6 PC_POWER_SUPPLY.9 PC_POWER_SUPPLY.10 PC_POWER_SUPPLY.12 PC_POWER_SUPPLY.13 PC_POWER_SUPPLY.14 R1.1 R12.2 R13.2 R14.2 R15.1 R16.1 R17.1 R18.1 R19.1 R20.1 R21.1 R22.1 R23.1 R24.1 R25.1 R26.1 R27.1 R28.1 R29.1 R30.1 R31.1 R32.1 R33.1 R34.1 R35.1 R36.1 R37.1 R38.1 R39.1 R40.1 R41.1 R42.1 R43.1 R44.1 R45.1 R46.1 R47.2 R48.2 R49.2 R50.2 R51.1 R52.1 R53.1 R54.1 R55.2 R56.2 R57.2 R58.2 R59.1 R60.1 R61.1 R62.1 R63.2 R64.2 R65.2 R66.2 R67.1 R68.1 R69.1 R70.1 R71.2 R72.2 R73.2 R74.2 R75.1 R76.1 R77.1 R78.1 R79.2 R80.2 R81.2 R82.2 R83.1 R84.1 R85.1 R86.1 R87.2 R88.2 R89.2 R90.2 R91.1 R92.1 R93.1 R94.1 R95.2 R96.2 R97.2 R98.2 R99.1 R100.1 R101.1 R102.1 R103.2 R104.2 R105.2 R106.2 R107.1 R108.1 R109.1 R110.1 R111.2 R112.2 R113.2 R114.2 R115.1 R116.1 R117.1 R118.1 R119.2 R120.2 R121.2 R122.2 R123.1 R124.1 R125.1 R126.1 R127.2 R128.2 R129.2 R130.2 R131.1 R132.1 R133.1 R134.1 R135.2 R136.2 R137.2 R138.2 R139.1 R140.1 R141.1 R142.1 R143.2 R144.2 R145.2 R146.2 R147.1 R148.1 R149.1 R150.1 R151.2 R152.2 R153.2 R154.2 R155.1 R156.1 R157.1 R158.1 R159.2 R160.2 R161.2 R162.2 R163.1 R164.1 R165.1 R166.1 R167.2 R168.2 R169.2 R170.2 R171.1 R172.1 R173.1 R174.1 R175.2 R179.2 R182.2 R183.2 R187.1 R189.2 RESET.1 RGB_CONN.3 SD1.3 SD1.SHIELD0 SD1.SHIELD1 SD1.SHIELD2 SD1.SHIELD3 SEG1.1 SEG1.6 SEG2.1 SEG2.6 SEG3.1 SEG3.6 SERVO_0.3 SERVO_1.3 SERVO_2.3 SERVO_3.3 SERVO_4.3 SERVO_5.3 SERVO_6.3 SERVO_7.3 SERVO_EXT_PWR.P$1 SW2.1 U1.5 U1.6 U1.17 U1.27 U1.39 U2.5 U2.13 U3.2 U4.2 U4.3 U4.4 U4.7 U5.8 U6.8 U7.8 U8.8 U9.8 U9.15 U10.8 U10.15 U11.8 U11.15 U12.8 U12.15 U13.8 U13.15 U14.8 U14.15 U15.8 U15.15 U16.8 U16.15 U17.1 U18.1 U19.1 U36.1 U36.4 U37.1 U37.4 U38.1 U39.8 U40.8 U41.8 U42.8 U75.2 U76.2 U77.2 U78.2 U79.2 U80.2 U81.4 U82.2 U83.7 U84.2 USB.5 USB.S1 USB.S2 USB.S3 USB.S4
IN0: R51.2 U9.11 U20.15
IN1: R52.2 U9.12 U20.13
IN2: R53.2 U9.13 U20.11
IN3: R54.2 U9.14 U20.9
IN4: R59.2 U9.3 U21.15
IN5: R60.2 U9.4 U21.13
IN6: R61.2 U9.5 U21.11
IN7: R62.2 U9.6 U21.9
IN8: R67.2 U10.11 U22.15
IN9: R68.2 U10.12 U22.13
IN10: R69.2 U10.13 U22.11
IN11: R70.2 U10.14 U22.9
IN12: R75.2 U10.3 U23.15
IN13: R76.2 U10.4 U23.13
IN14: R77.2 U10.5 U23.11
IN15: R78.2 U10.6 U23.9
IN16: R83.2 U11.11 U24.15
IN17: R84.2 U11.12 U24.13
IN18: R85.2 U11.13 U24.11
IN19: R86.2 U11.14 U24.9
IN20: R91.2 U11.3 U25.15
IN21: R92.2 U11.4 U25.13
IN22: R93.2 U11.5 U25.11
IN23: R94.2 U11.6 U25.9
IN24: R99.2 U12.11 U26.15
IN25: R100.2 U12.12 U26.13
IN26: R101.2 U12.13 U26.11
IN27: R102.2 U12.14 U26.9
IN28: R107.2 U12.3 U27.15
IN29: R108.2 U12.4 U27.13
IN30: R109.2 U12.5 U27.11
IN31: R110.2 U12.6 U27.9
IN32: R115.2 U13.11 U28.15
IN33: R116.2 U13.12 U28.13
IN34: R117.2 U13.13 U28.11
IN35: R118.2 U13.14 U28.9
IN36: R123.2 U13.3 U29.15
IN37: R124.2 U13.4 U29.13
IN38: R125.2 U13.5 U29.11
IN39: R126.2 U13.6 U29.9
IN40: R131.2 U14.11 U30.15
IN41: R132.2 U14.12 U30.13
IN42: R133.2 U14.13 U30.11
IN43: R134.2 U14.14 U30.9
IN44: R139.2 U14.3 U31.15
IN45: R140.2 U14.4 U31.13
IN46: R141.2 U14.5 U31.11
IN47: R142.2 U14.6 U31.9
IN48: R147.2 U15.11 U32.15
IN49: R148.2 U15.12 U32.13
IN50: R149.2 U15.13 U32.11
IN51: R150.2 U15.14 U32.9
IN52: R155.2 U15.3 U33.15
IN53: R156.2 U15.4 U33.13
IN54: R157.2 U15.5 U33.11
IN55: R158.2 U15.6 U33.9
IN56: R163.2 U16.11 U34.15
IN57: R164.2 U16.12 U34.13
IN58: R165.2 U16.13 U34.11
IN59: R166.2 U16.14 U34.9
IN60: R171.2 U16.3 U35.15
IN61: R172.2 U16.4 U35.13
IN62: R173.2 U16.5 U35.11
IN63: R174.2 U16.6 U35.9
INPUT0: INPUT_BANK_0.1 U20.1
INPUT1: INPUT_BANK_0.2 U20.3
INPUT2: INPUT_BANK_0.3 U20.5
INPUT3: INPUT_BANK_0.4 U20.7
INPUT4: INPUT_BANK_0.5 U21.1
INPUT5: INPUT_BANK_0.6 U21.3
INPUT6: INPUT_BANK_0.7 U21.5
INPUT7: INPUT_BANK_0.8 U21.7
INPUT8: INPUT_BANK_1.1 U22.1
INPUT9: INPUT_BANK_1.2 U22.3
INPUT10: INPUT_BANK_1.3 U22.5
INPUT11: INPUT_BANK_1.4 U22.7
INPUT12: INPUT_BANK_1.5 U23.1
INPUT13: INPUT_BANK_1.6 U23.3
INPUT14: INPUT_BANK_1.7 U23.5
INPUT15: INPUT_BANK_1.8 U23.7
INPUT16: INPUT_BANK_2.1 U24.1
INPUT17: INPUT_BANK_2.2 U24.3
INPUT18: INPUT_BANK_2.3 U24.5
INPUT19: INPUT_BANK_2.4 U24.7
INPUT20: INPUT_BANK_2.5 U25.1
INPUT21: INPUT_BANK_2.6 U25.3
INPUT22: INPUT_BANK_2.7 U25.5
INPUT23: INPUT_BANK_2.8 U25.7
INPUT24: INPUT_BANK_3.1 U26.1
INPUT25: INPUT_BANK_3.2 U26.3
INPUT26: INPUT_BANK_3.3 U26.5
INPUT27: INPUT_BANK_3.4 U26.7
INPUT28: INPUT_BANK_3.5 U27.1
INPUT29: INPUT_BANK_3.6 U27.3
INPUT30: INPUT_BANK_3.7 U27.5
INPUT31: INPUT_BANK_3.8 U27.7
INPUT32: INPUT_BANK_4.1 U28.1
INPUT33: INPUT_BANK_4.2 U28.3
INPUT34: INPUT_BANK_4.3 U28.5
INPUT35: INPUT_BANK_4.4 U28.7
INPUT36: INPUT_BANK_4.5 U29.1
INPUT37: INPUT_BANK_4.6 U29.3
INPUT38: INPUT_BANK_4.7 U29.5
INPUT39: INPUT_BANK_4.8 U29.7
INPUT40: INPUT_BANK_5.1 U30.1
INPUT41: INPUT_BANK_5.2 U30.3
INPUT42: INPUT_BANK_5.3 U30.5
INPUT43: INPUT_BANK_5.4 U30.7
INPUT44: INPUT_BANK_5.5 U31.1
INPUT45: INPUT_BANK_5.6 U31.3
INPUT46: INPUT_BANK_5.7 U31.5
INPUT47: INPUT_BANK_5.8 U31.7
INPUT48: INPUT_BANK_6.1 U32.1
INPUT49: INPUT_BANK_6.2 U32.3
INPUT50: INPUT_BANK_6.3 U32.5
INPUT51: INPUT_BANK_6.4 U32.7
INPUT52: INPUT_BANK_6.5 U33.1
INPUT53: INPUT_BANK_6.6 U33.3
INPUT54: INPUT_BANK_6.7 U33.5
INPUT55: INPUT_BANK_6.8 U33.7
INPUT56: INPUT_BANK_7.1 U34.1
INPUT57: INPUT_BANK_7.2 U34.3
INPUT58: INPUT_BANK_7.3 U34.5
INPUT59: INPUT_BANK_7.4 U34.7
INPUT60: INPUT_BANK_7.5 U35.1
INPUT61: INPUT_BANK_7.6 U35.3
INPUT62: INPUT_BANK_7.7 U35.5
INPUT63: INPUT_BANK_7.8 U35.7
IREF0: R12.1 U17.3
IREF1: R13.1 U18.3
IREF2: R14.1 U19.3
IREF3: R175.1 U38.3
IRQ: R6.1 SD1.1
LED0: LIGHT_BANK_0.1 U17.6
LED1: LIGHT_BANK_0.2 U17.7
LED2: LIGHT_BANK_0.3 U17.8
LED3: LIGHT_BANK_0.4 U17.9
LED4: LIGHT_BANK_0.5 U17.10
LED5: LIGHT_BANK_0.6 U17.11
LED6: LIGHT_BANK_0.7 U17.12
LED7: LIGHT_BANK_0.8 U17.13
LED8: LIGHT_BANK_0.9 U17.14
LED9: LIGHT_BANK_1.9 U17.15
LED10: LIGHT_BANK_1.8 U17.16
LED11: LIGHT_BANK_1.7 U17.17
LED12: LIGHT_BANK_1.6 U17.18
LED13: LIGHT_BANK_1.5 U17.19
LED14: LIGHT_BANK_1.4 U17.20
LED15: LIGHT_BANK_1.3 U17.21
LED16: LIGHT_BANK_1.2 U17.22
LED17: LIGHT_BANK_1.1 U17.23
LED18: LIGHT_BANK_2.1 U18.6
LED19: LIGHT_BANK_2.2 U18.7
LED20: LIGHT_BANK_2.3 U18.8
LED21: LIGHT_BANK_2.4 U18.9
LED22: LIGHT_BANK_2.5 U18.10
LED23: LIGHT_BANK_2.6 U18.11
LED24: LIGHT_BANK_2.7 U18.12
LED25: LIGHT_BANK_2.8 U18.13
LED26: LIGHT_BANK_2.9 U18.14
LED27: LIGHT_BANK_3.9 U18.15
LED28: LIGHT_BANK_3.8 U18.16
LED29: LIGHT_BANK_3.7 U18.17
LED30: LIGHT_BANK_3.6 U18.18
LED31: LIGHT_BANK_3.5 U18.19
LED32: LIGHT_BANK_3.4 U18.20
LED33: LIGHT_BANK_3.3 U18.21
LED34: LIGHT_BANK_3.2 U18.22
LED35: LIGHT_BANK_3.1 U18.23
LED36: LIGHT_BANK_4.1 U19.6
LED37: LIGHT_BANK_4.2 U19.7
LED38: LIGHT_BANK_4.3 U19.8
LED39: LIGHT_BANK_4.4 U19.9
LED40: LIGHT_BANK_4.5 U19.10
LED41: LIGHT_BANK_4.6 U19.11
LED42: LIGHT_BANK_4.7 U19.12
LED43: LIGHT_BANK_4.8 U19.13
LED44: LIGHT_BANK_4.9 U19.14
LED45: LIGHT_BANK_5.9 U19.15
LED46: LIGHT_BANK_5.8 U19.16
LED47: LIGHT_BANK_5.7 U19.17
LED48: LIGHT_BANK_5.6 U19.18
LED49: LIGHT_BANK_5.5 U19.19
LED50: LIGHT_BANK_5.4 U19.20
LED51: LIGHT_BANK_5.3 U19.21
LED52: LIGHT_BANK_5.2 U19.22
LED53: LIGHT_BANK_5.1 U19.23
LED54: LIGHT_BANK_6.1 U38.6
LED55: LIGHT_BANK_6.2 U38.7
LED56: LIGHT_BANK_6.3 U38.8
LED57: LIGHT_BANK_6.4 U38.9
LED58: LIGHT_BANK_6.5 U38.10
LED59: LIGHT_BANK_6.6 U38.11
LED60: LIGHT_BANK_6.7 U38.12
LED61: LIGHT_BANK_6.8 U38.13
LED62: LIGHT_BANK_6.9 U38.14
LED63: LIGHT_BANK_7.9 U38.15
LED64: LIGHT_BANK_7.8 U38.16
LED65: LIGHT_BANK_7.7 U38.17
LED66: LIGHT_BANK_7.6 U38.18
LED67: LIGHT_BANK_7.5 U38.19
LED68: LIGHT_BANK_7.4 U38.20
LED69: LIGHT_BANK_7.3 U38.21
LED70: LIGHT_BANK_7.2 U38.22
LED71: LIGHT_BANK_7.1 U38.23
LED_CK0: U1.32 U17.4
LED_CK1: U17.25 U18.4
LED_CK2: U18.25 U19.4
LED_CK3: U19.25 U38.4
LED_CK4: U38.25 U82.3
LED_CK4_OUT: RGB_CONN.1 U82.1
LED_SD0: U1.31 U17.5
LED_SD1: U17.24 U18.5
LED_SD2: U18.24 U19.5
LED_SD3: U19.24 U38.5
LED_SD4: U38.24 U82.4
LED_SD4_OUT: RGB_CONN.2 U82.6
N$1: R188.2 U84.1
N$2: D5.C R187.2
OUT0: R16.2 S0.G U5.15
OUT1: R15.2 S1.G U5.1
OUT2: R18.2 S2.G U5.2
OUT3: R17.2 S3.G U5.3
OUT4: R20.2 S4.G U5.4
OUT5: R19.2 S5.G U5.5
OUT6: R22.2 S6.G U5.6
OUT7: R21.2 S7.G U5.7
OUT8: R24.2 S8.G U6.15
OUT9: R23.2 S9.G U6.1
OUT10: R26.2 S10.G U6.2
OUT11: R25.2 S11.G U6.3
OUT12: R28.2 S12.G U6.4
OUT13: R27.2 S13.G U6.5
OUT14: R30.2 S14.G U6.6
OUT15: R29.2 S15.G U6.7
OUT16: R32.2 S16.G U7.15
OUT17: R31.2 S17.G U7.1
OUT18: R34.2 S18.G U7.2
OUT19: R33.2 S19.G U7.3
OUT20: R36.2 S20.G U7.4
OUT21: R35.2 S21.G U7.5
OUT22: R38.2 S22.G U7.6
OUT23: R37.2 S23.G U7.7
OUT24: R40.2 S24.G U8.15
OUT25: R39.2 S25.G U8.1
OUT26: R42.2 S26.G U8.2
OUT27: R41.2 S27.G U8.3
OUT28: R44.2 S28.G U8.4
OUT29: R43.2 S29.G U8.5
OUT30: R46.2 S30.G U8.6
OUT31: R45.2 S31.G U8.7
OUTPUT_00: OUTPUT_BANK_0.P$1 S0.D
OUTPUT_01: OUTPUT_BANK_0.P$2 S1.D
OUTPUT_02: OUTPUT_BANK_0.P$3 S2.D
OUTPUT_03: OUTPUT_BANK_0.P$4 S3.D
OUTPUT_04: OUTPUT_BANK_0.P$5 S4.D
OUTPUT_05: OUTPUT_BANK_0.P$6 S5.D
OUTPUT_06: OUTPUT_BANK_0.P$7 S6.D
OUTPUT_07: OUTPUT_BANK_0.P$8 S7.D
OUTPUT_08: OUTPUT_BANK_1.P$1 S8.D
OUTPUT_09: OUTPUT_BANK_1.P$2 S9.D
OUTPUT_10: OUTPUT_BANK_1.P$3 S10.D
OUTPUT_11: OUTPUT_BANK_1.P$4 S11.D
OUTPUT_12: OUTPUT_BANK_1.P$5 S12.D
OUTPUT_13: OUTPUT_BANK_1.P$6 S13.D
OUTPUT_14: OUTPUT_BANK_1.P$7 S14.D
OUTPUT_15: OUTPUT_BANK_1.P$8 S15.D
OUTPUT_16: OUTPUT_BANK_2.P$1 S16.D
OUTPUT_17: OUTPUT_BANK_2.P$2 S17.D
OUTPUT_18: OUTPUT_BANK_2.P$3 S18.D
OUTPUT_19: OUTPUT_BANK_2.P$4 S19.D
OUTPUT_20: OUTPUT_BANK_2.P$5 S20.D
OUTPUT_21: OUTPUT_BANK_2.P$6 S21.D
OUTPUT_22: OUTPUT_BANK_2.P$7 S22.D
OUTPUT_23: OUTPUT_BANK_2.P$8 S23.D
OUTPUT_24: OUTPUT_BANK_3.P$1 S24.D
OUTPUT_25: OUTPUT_BANK_3.P$2 S25.D
OUTPUT_26: OUTPUT_BANK_3.P$3 S26.D
OUTPUT_27: OUTPUT_BANK_3.P$4 S27.D
OUTPUT_28: OUTPUT_BANK_3.P$5 S28.D
OUTPUT_29: OUTPUT_BANK_3.P$6 S29.D
OUTPUT_30: OUTPUT_BANK_3.P$7 S30.D
OUTPUT_31: OUTPUT_BANK_3.P$8 S31.D
OUTPUT_EN: R179.1 U5.13 U6.13 U7.13 U8.13 U39.13 U40.13 U41.13 U42.13 U81.5
PWR_EN: PC_POWER_SUPPLY.8 SW2.2
PWR_LED: D4.A R186.1
RELAY_PWR_DRAIN: D5.A EM1.5 U84.3
RES: C7.2 R176.1 RESET.2 U1.7
RTS: C7.1 U2.2
RW: R11.1 SD1.8
RX: U1.37 U2.4
RXLED: R2.1 U2.14
SCL: R4.1 U1.35 U4.6 U75.4 U83.1
SCL_OUT: AUX.7 U75.6
SD_CS: R10.1 SD1.7 U1.44
SD_DI: R9.1 SD1.6 U1.43
SD_DO: R7.1 SD1.2 U1.41
SD_SCLK: R8.1 SD1.4 U1.42
SDA: R5.1 U1.36 U4.5 U75.3 U83.2
SDA_OUT: AUX.6 U75.1
SEG0: SEG1.10 U40.15
SEG1: SEG1.9 U40.1
SEG2: SEG1.8 U40.3
SEG3: SEG1.5 U40.7
SEG4: SEG1.4 U40.6
SEG5: SEG1.2 U40.4
SEG6: SEG1.3 U40.5
SEG7: SEG1.7 U40.2
SEG8: SEG2.10 U41.15
SEG9: SEG2.9 U41.1
SEG10: SEG2.8 U41.3
SEG11: SEG2.5 U41.7
SEG12: SEG2.4 U41.6
SEG13: SEG2.2 U41.4
SEG14: SEG2.3 U41.5
SEG15: SEG2.7 U41.2
SEG16: SEG3.10 U42.15
SEG17: SEG3.9 U42.1
SEG18: SEG3.8 U42.3
SEG19: SEG3.5 U42.7
SEG20: SEG3.4 U42.6
SEG21: SEG3.2 U42.4
SEG22: SEG3.3 U42.5
SERVO_0: SERVO_0.1 U39.15
SERVO_1: SERVO_1.1 U39.1
SERVO_2: SERVO_2.1 U39.2
SERVO_3: SERVO_3.1 U39.3
SERVO_4: SERVO_4.1 U39.4
SERVO_5: SERVO_5.1 U39.5
SERVO_6: SERVO_6.1 U39.6
SERVO_7: SERVO_7.1 U39.7
SERVO_EXT: J36.2 SERVO_EXT_PWR.P$2
SERVO_PWR: C65.POS J36.OUT SERVO_0.2 SERVO_1.2 SERVO_2.2 SERVO_3.2 SERVO_4.2 SERVO_5.2 SERVO_6.2 SERVO_7.2
SIO_0: U1.19 U36.5
SIO_1: U1.20 U36.2
SIO_2: U1.21 U36.3
SIO_3: U1.22 U36.7
SIO_4: U1.23 U37.5
SIO_5: U1.24 U37.2
SIO_6: U1.25 U37.3
SIO_7: U1.26 U37.7
SOL_PWR_RELAY: EM1.3 FUSE.1A FUSE.1B
SOL_PWR_RELAY_CTRL: R188.1 R189.1 SEG3.7 U42.2
SOLENOID_GND: C62.N C63.N C64.N R182.1 R183.1 S0.S S1.S S2.S S3.S S4.S S5.S S6.S S7.S S8.S S9.S S10.S S11.S S12.S S13.S S14.S S15.S S16.S S17.S S18.S S19.S S20.S S21.S S22.S S23.S S24.S S25.S S26.S S27.S S28.S S29.S S30.S S31.S SOLENOID_PWR.2 SOLENOID_PWR.3
SOLENOID_PWR: C62.P C63.P C64.P EM1.1 OUTPUT_BANK_0.P$9 OUTPUT_BANK_1.P$9 OUTPUT_BANK_2.P$9 OUTPUT_BANK_3.P$9
SOLENOID_PWR_IN: FUSE.2A FUSE.2B SOLENOID_PWR.1 SOLENOID_PWR.4
SRAM_CLK_0: U1.15 U36.6
SRAM_CLK_1: U1.16 U37.6
TX: U1.38 U2.1
TXLED: R3.1 U2.7
USBDM: R180.1 U2.9
USBDP: R181.1 U2.8
V_LED: C66.2 C67.2 C68.2 C69.2 J35.OUT LIGHT_BANK_0.10 LIGHT_BANK_1.10 LIGHT_BANK_2.10 LIGHT_BANK_3.10 LIGHT_BANK_4.10 LIGHT_BANK_5.10 LIGHT_BANK_6.10 LIGHT_BANK_7.10
VBUS: C1.1 D1.A D2.A D3.A U2.12 U3.5 USB.1
X0: U1.29 X1.1
X1: U1.28 X1.3

## Tracks (layer width: path | path; a pad name or v marks a point on that pad's centre or on a via)
3.3V  (via drill 0.6)
  Top 0.254: v178.53,112.52 C8.2 179.43,110.38 | U8.16 180.32,111.26 179.43,110.38 | v160.62,112.52 C9.2 161.78,110.38 | U7.16 162.4,112.52 162.4,111 161.78,110.38 | v145.13,112.52 C10.2 146.03,110.38 | U6.16 146.92,111.26 146.03,110.38 | v126.46,112.52 C11.2 127.36,110.38 | U5.16 128.25,111.26 127.36,110.38 | v193.77,121.67 C27.2 192.79,123.81 | U39.16 191.98,123 192.79,123.81 | v161.77,122.17 C28.2 160.36,124.32 | U40.16 159.72,123.68 160.36,124.32 | v152.62,122.17 C29.2 151.47,124.32 | U41.16 150.83,123.68 151.47,124.32 | v143.73,122.17 C30.2 142.58,124.32 | U42.16 141.94,123.68 142.58,124.32 | U32.10 80.97,59.82 v83.53,59.82 | U32.12 80.72,62.87 v83.53,62.87 | U32.14 81.12,65.28 81.76,65.91 v83.53,65.91 | U32.16 81.73,68.96 v83.53,68.96 | U33.10 68.27,59.82 v70.83,59.82 | U33.12 68.02,62.87 v70.83,62.87 | U33.14 68.42,65.28 69.06,65.91 v70.83,65.91 | U33.16 69.03,68.96 v70.83,68.96 | U28.10 30.17,59.82 v32.73,59.82 | U28.12 29.91,62.87 v32.73,62.87 | U28.14 30.32,65.28 30.96,65.91 v32.73,65.91 | U28.16 30.93,68.96 v32.73,68.96 | U29.16 18.23,68.96 v20.03,68.96 | U29.14 17.62,65.28 18.26,65.91 v20.03,65.91 | U29.12 17.21,62.87 v20.03,62.87 | v20.03,59.82 17.47,59.82 U29.10 | U24.10 80.72,90.81 v83.28,90.81 | U24.12 80.46,93.85 v83.28,93.85 | U24.14 80.87,96.27 81.5,96.9 v83.28,96.9 | U24.16 81.48,99.95 v83.28,99.95 | U25.10 68.02,90.81 v70.45,90.81 | U25.12 67.76,93.85 v70.45,93.85 | U25.14 68.17,96.27 68.8,96.9 v70.45,96.9 | U25.16 68.78,99.95 v70.45,99.95 | U20.10 29.91,90.81 v32.48,90.81 | U20.12 29.66,93.85 v32.48,93.85 | U20.14 30.07,96.27 30.7,96.9 v32.48,96.9 | U20.16 30.68,99.95 v32.48,99.95 | U21.10 17.21,90.81 v19.65,90.81
  Top 0.254: U21.12 16.96,93.85 v19.65,93.85 | U21.14 17.24,96.27 17.88,96.9 v19.65,96.9 | U21.16 17.98,99.95 v19.65,99.95 | U34.14 106.39,65.28 107.16,66.04 v109.19,66.04 | U34.12 106.24,62.99 v109.19,62.99 | U34.10 106.24,59.94 v109.19,59.94 | U35.10 93.54,59.94 v96.23,59.94 | U35.12 93.54,62.99 v96.23,62.99 | U35.14 93.69,65.28 94.46,66.04 v96.23,66.04 | U35.16 94.56,69.09 v96.23,69.09 | U34.16 107.26,69.09 v109.19,69.09 | U30.10 55.44,59.94 v58.13,59.94 | U30.12 55.44,62.99 v58.13,62.99 | U30.14 55.59,65.28 56.36,66.04 v58.13,66.04 | U30.16 56.46,69.09 v58.13,69.09 | U31.16 43.76,69.09 v45.43,69.09 | U31.14 42.89,65.28 43.66,66.04 v45.43,66.04 | U31.12 42.74,62.99 v45.43,62.99 | U31.10 42.74,59.94 v45.43,59.94 | U26.10 106.24,91.06 v108.93,91.06 | U26.12 106.24,94.11 v108.93,94.11 | U26.14 106.39,96.39 107.16,97.16 v108.93,97.16 | U26.16 107.26,100.2 v108.93,100.2 | U27.10 93.54,91.06 v96.23,91.06 | U27.12 93.54,94.11 v96.23,94.11 | U27.14 93.69,96.39 94.46,97.16 v96.23,97.16 | U27.16 94.56,100.2 v96.23,100.2 | U22.10 55.19,90.93 v57.88,90.93 | U22.12 55.19,93.98 v57.88,93.98 | U22.16 56.2,100.08 v57.88,100.08 | U22.14 55.34,96.27 56.1,97.03 v57.88,97.03 | U23.16 43.5,100.08 v45.18,100.08 | U23.10 42.49,90.93 v45.18,90.93 | U23.12 42.49,93.98 v45.18,93.98 | U23.14 42.64,96.27 43.4,97.03 v45.18,97.03 | U15.16 76.93,75.68 | 76.93,75.68 78.44,75.68 v79.22,74.93 | U16.16 102.58,75.68 | 102.58,75.68 104.1,75.68 v104.87,74.93 | C20.2 102.33,75.94 102.58,75.68 | C19.2 76.93,75.68 | U14.16 51.28,75.68 | 51.28,75.68 52.79,75.68 v53.82,74.68 | C18.2 51.28,75.68 | C13.2 25.88,106.92 | U78.5 v12.67,114.62 | U77.5 v12.67,119.7 | U76.5 v12.67,125.04
  Top 0.254: U75.5 v60.42,119.38 | U79.5 v65.75,119.38 | U80.5 v70.83,119.38 | U83.8 69.03,128.52 | 69.03,128.52 69.03,129.43 C61.2 68.04,129.79 v67.28,129.03 | C60.2 69.03,128.52 | U81.3 133.07,126.49 | 133.07,126.49 U81.2 | U5.10 132.15,111.35 131.17,110.38 127.36,110.38 | U6.10 150.82,111.23 149.97,110.38 146.03,110.38 | U7.10 166.31,111.23 165.46,110.38 161.78,110.38 | U8.10 184.22,111.35 183.24,110.38 179.43,110.38 | U39.10 188.08,122.83 189.06,123.81 192.79,123.81 | U40.10 155.82,123.34 156.8,124.32 160.36,124.32 | U41.10 146.93,123.34 147.91,124.32 151.47,124.32 | U42.10 138.04,123.34 139.02,124.32 142.58,124.32 | 129.38,124.59 131.29,126.49 133.07,126.49 | 129.38,124.59 129.38,122.05 v129.51,121.92 | U81.8 129.38,124.59 | v17.27,142.53 SD1.5 17.27,146.84 16.51,147.61 13.99,147.61 11.94,145.56 11.94,143.8 10.13,141.99 C21.1 | R6.2 R7.2 R8.2 6.72,143.29 C21.1 | C21.1 6.72,140.69 R9.2 R10.2 R11.2 6.86,137.56 6.86,140.75 | R186.2 115.79,137.05 v115.79,137.41 | U82.5 11.43,2.89 11.81,2.51 22.86,2.51 RGB_CONN.4 | EM1.2 115.95,13.59 113.79,15.75 v112.27,15.75
  Top 0.305: U12.16 102.08,106.8 | 102.08,106.8 103.33,106.8 v103.85,107.31 | C16.2 102.33,107.05 102.08,106.8 | U13.16 24.35,76.95 26.38,76.95 | 26.38,76.95 26.63,76.95 v28.92,74.68 | C17.2 26.38,76.95 | U11.16 76.68,106.92 | 76.68,106.92 77.68,106.92 v78.2,107.44 | C15.2 76.68,106.92 | U9.16 25.88,106.92 26.63,106.92 v27.15,107.44 | U10.16 51.68,107.18 C14.2 51.9,107.19 v53.82,107.19
  Top 0.406: U1.30 37.64,123.15 C3.2 38.69,120.76 v38.58,120.65 | U1.18 27.5,130.01 C5.2 25.89,129.8 v25.62,129.54 | C4.2 44.84,131.83 v45.94,131.83 | 44.59,131.61 C4.2 | U1.8 34.44,140.97 | 34.44,140.97 34.44,141.55 v34,141.99 | C6.2 34.42,140.96 34.44,140.97 | R176.2 46.2,142.48 v46.2,142.24 | U17.28 109.81,33.01 C22.2 v111.46,32.26 | v83.02,32.51 C23.2 80.86,32.5 U18.28 | v54.32,32.77 C24.2 51.91,32.5 U19.28 | v26.13,32.77 C31.2 23.72,32.5 U38.28 | U1.40 44.59,131.61 | 44.59,131.61 arc90 C4.2 | v53.31,116.59 53.31,118.48 C12.2 51.77,120.02 U4.8 | R5.2 v48.74,127.76 | R4.2 v48.48,118.62 | 24.35,121.27 U37.8 | 24.35,121.27 v24.35,122.68 | 24.35,121.27 C26.2 | v18,122.68 C25.2 18,121.27 U36.8
  Top 0.61: AUX.1 77.07,113.79 C59.2
  Top 0.813: 117.68,128.27 117.68,132.16 115.79,134.05 | 117.68,128.27 117.68,124.71 | 117.68,124.71 C35.1 C36.1 117.68,120.4 v115.54,120.4 | C33.+ 117.19,128.27 117.68,128.27 | C32.+ 117.68,124.71 | 122.9,140.72 122.9,140.46 120.62,138.18 116.3,138.18 115.79,137.67 v115.79,137.41 v115.79,136.14 115.79,134.05 | C34.POS 115.79,133.92 115.79,134.05
  POWER 0.254: v178.53,112.52 179.04,112.52 | v160.62,112.52 160.62,113.28 | v145.13,112.52 145.64,112.52 | v126.46,112.52 126.97,112.52 | v193.77,121.67 193.26,121.67 | v161.77,122.17 161,122.17 | v152.62,122.17 152.11,122.17 | v143.73,122.17 143.48,122.17 | v83.53,62.87 83.53,63.12 | v83.53,65.91 83.53,66.17 | v83.53,68.96 83.53,69.22 | v70.83,59.82 70.83,60.33 | v70.83,62.87 70.83,63.12 | v70.83,65.91 70.83,66.17 | v70.83,68.96 70.83,68.71 | v32.73,59.82 32.73,60.07 | v32.73,62.87 32.73,62.61 | v32.73,65.91 32.73,65.66 | v32.73,68.96 32.73,69.22 | v20.03,68.96 20.03,68.71 | v20.03,65.91 20.03,66.17 | v20.03,62.87 20.03,63.12 | v20.03,59.82 20.03,60.07 | v83.28,90.81 83.28,91.06 | v83.28,93.85 83.28,94.11 | v83.28,96.9 83.28,97.16 | v83.28,99.95 83.28,99.69 | v70.45,90.81 70.58,90.93 70.58,91.19 | v70.45,93.85 70.33,93.98 | v70.45,96.9 70.58,97.03 | v70.45,99.95 70.33,99.82 | v32.48,90.81 32.48,91.19 | v32.48,93.85 32.48,93.98 | v32.48,96.9 32.48,97.03 | v32.48,99.95 32.48,99.82 | v19.65,90.81 19.78,90.93 | v19.65,93.85 19.78,93.98 | v19.65,96.9 19.53,97.03 | v19.65,99.95 19.53,99.82 | v109.19,66.04 109.19,66.29 | v109.19,62.99 109.19,63.25 | v109.19,59.94 109.19,60.2 | v96.23,59.94 96.23,60.2 | v96.23,62.99 96.23,63.25 | v96.23,66.04 96.23,65.79 | v96.23,69.09 96.23,68.83 | v109.19,69.09 109.44,69.09 | v58.13,59.94 58.13,60.2 | v58.13,62.99 58.13,62.74 | v58.13,66.04 58.13,66.29 | v58.13,69.09 58.13,69.34 | v45.43,69.09 45.43,68.83 | v45.43,66.04 45.43,66.55 | v45.43,62.99 45.43,63.25 | v45.43,59.94 45.43,60.2 | v108.93,91.06 108.93,91.31 | v108.93,94.11 108.93,94.36 | v108.93,97.16 108.93,97.41 | v108.93,100.2 108.93,100.46 | v96.23,91.06 96.23,91.31 | v96.23,94.11 96.23,94.36